# Altium PCB MotorControllerPCB.PcbDoc
Units mm, origin at the board's own origin, x right, y up, seen from the top; angles counter-clockwise.
Board outline 50 x 50 mm, 4 copper layers (L1 [Signal], L2 [GND], L3 [GND], L4 [Signal]), stack 1.57 mm thick; 83 components, 53 nets, 347 pads, 135 vias.
Unrouted connection lines stored in the file: 178.
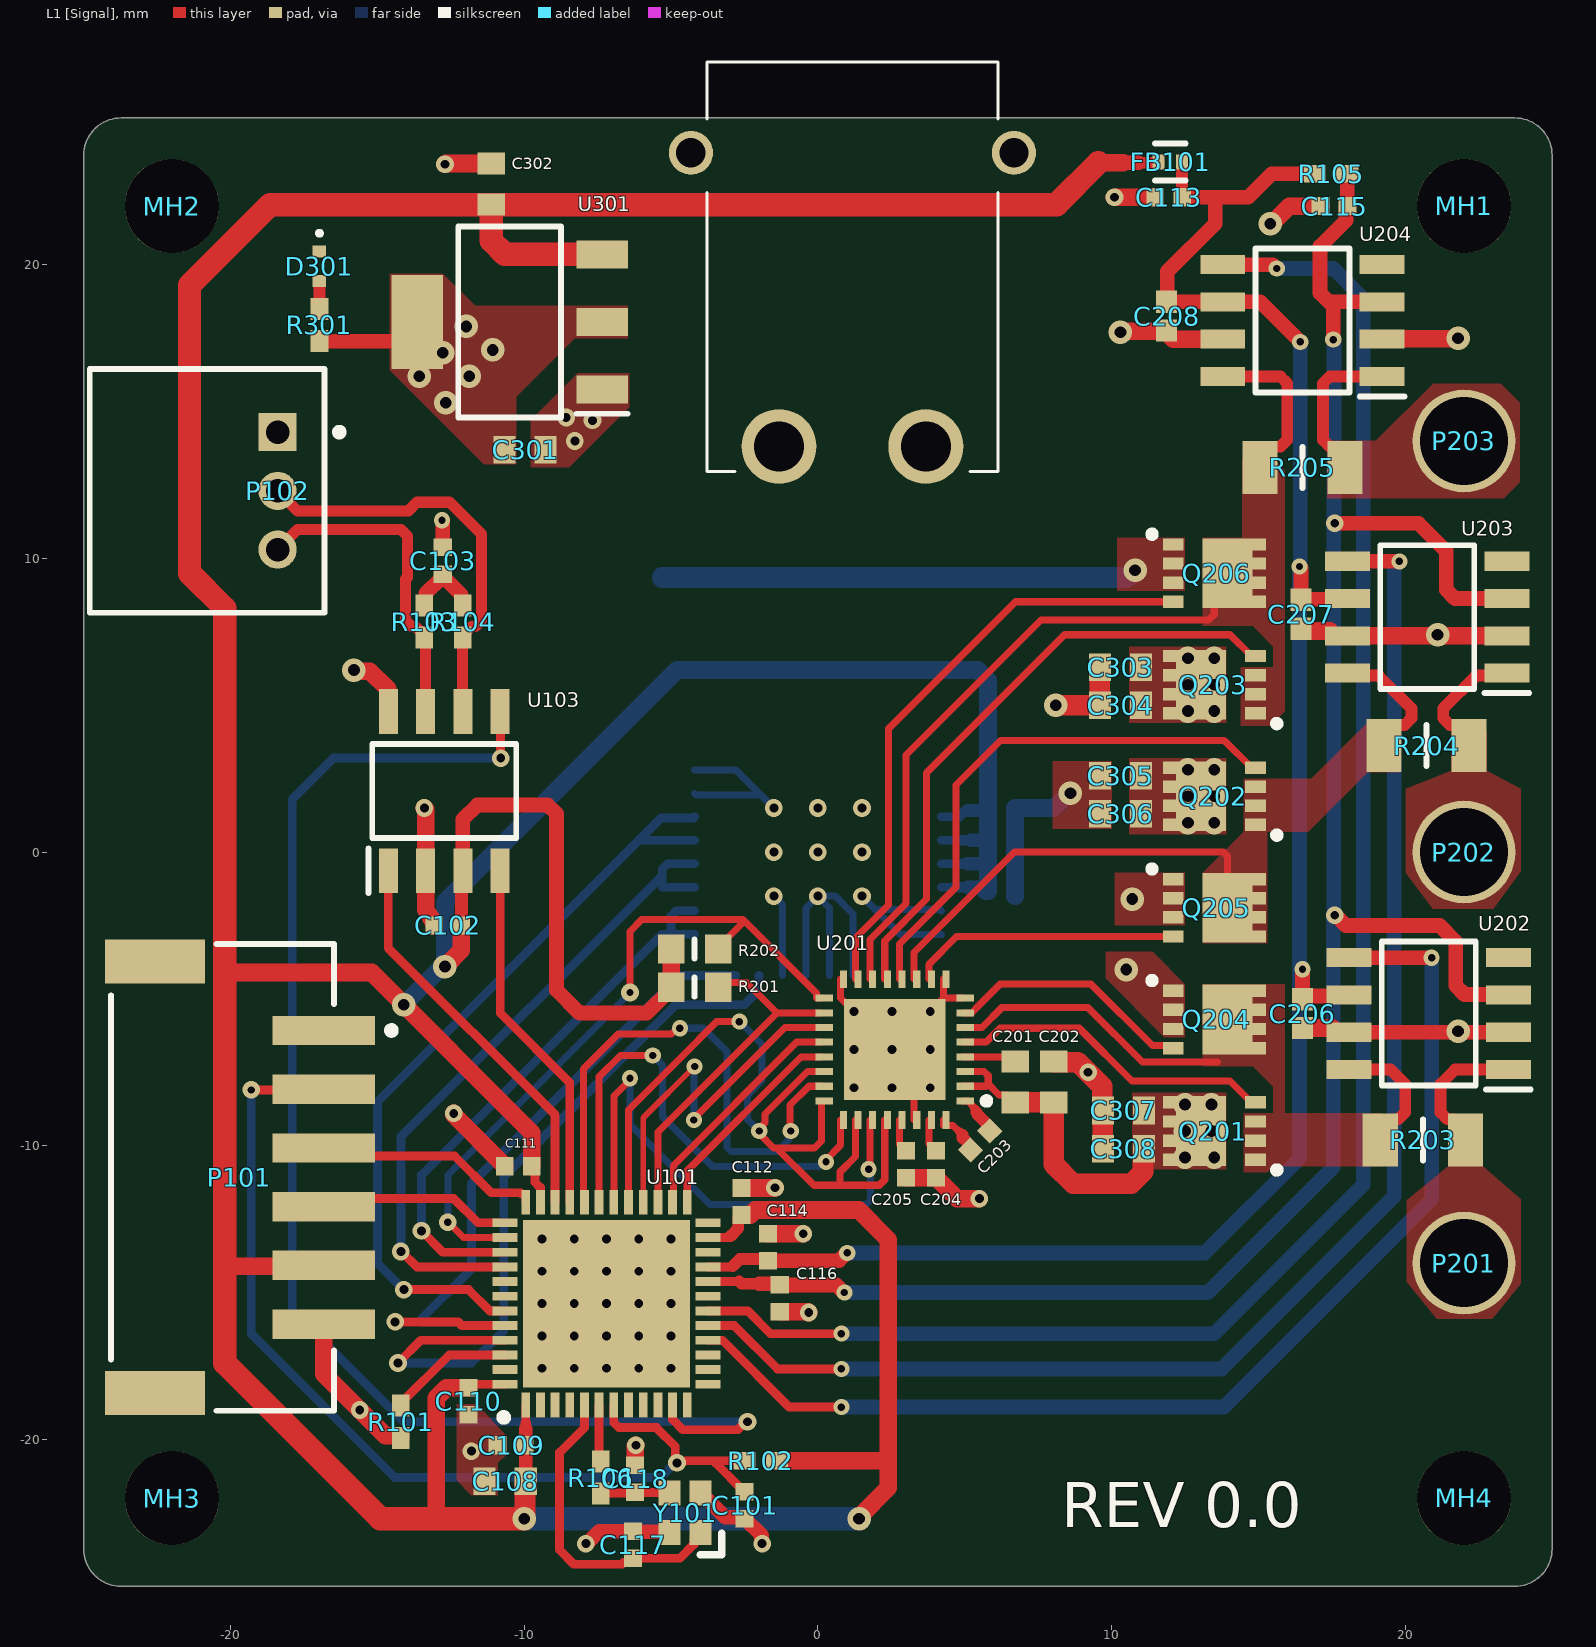
[diagram p0: L1 [Signal] view]
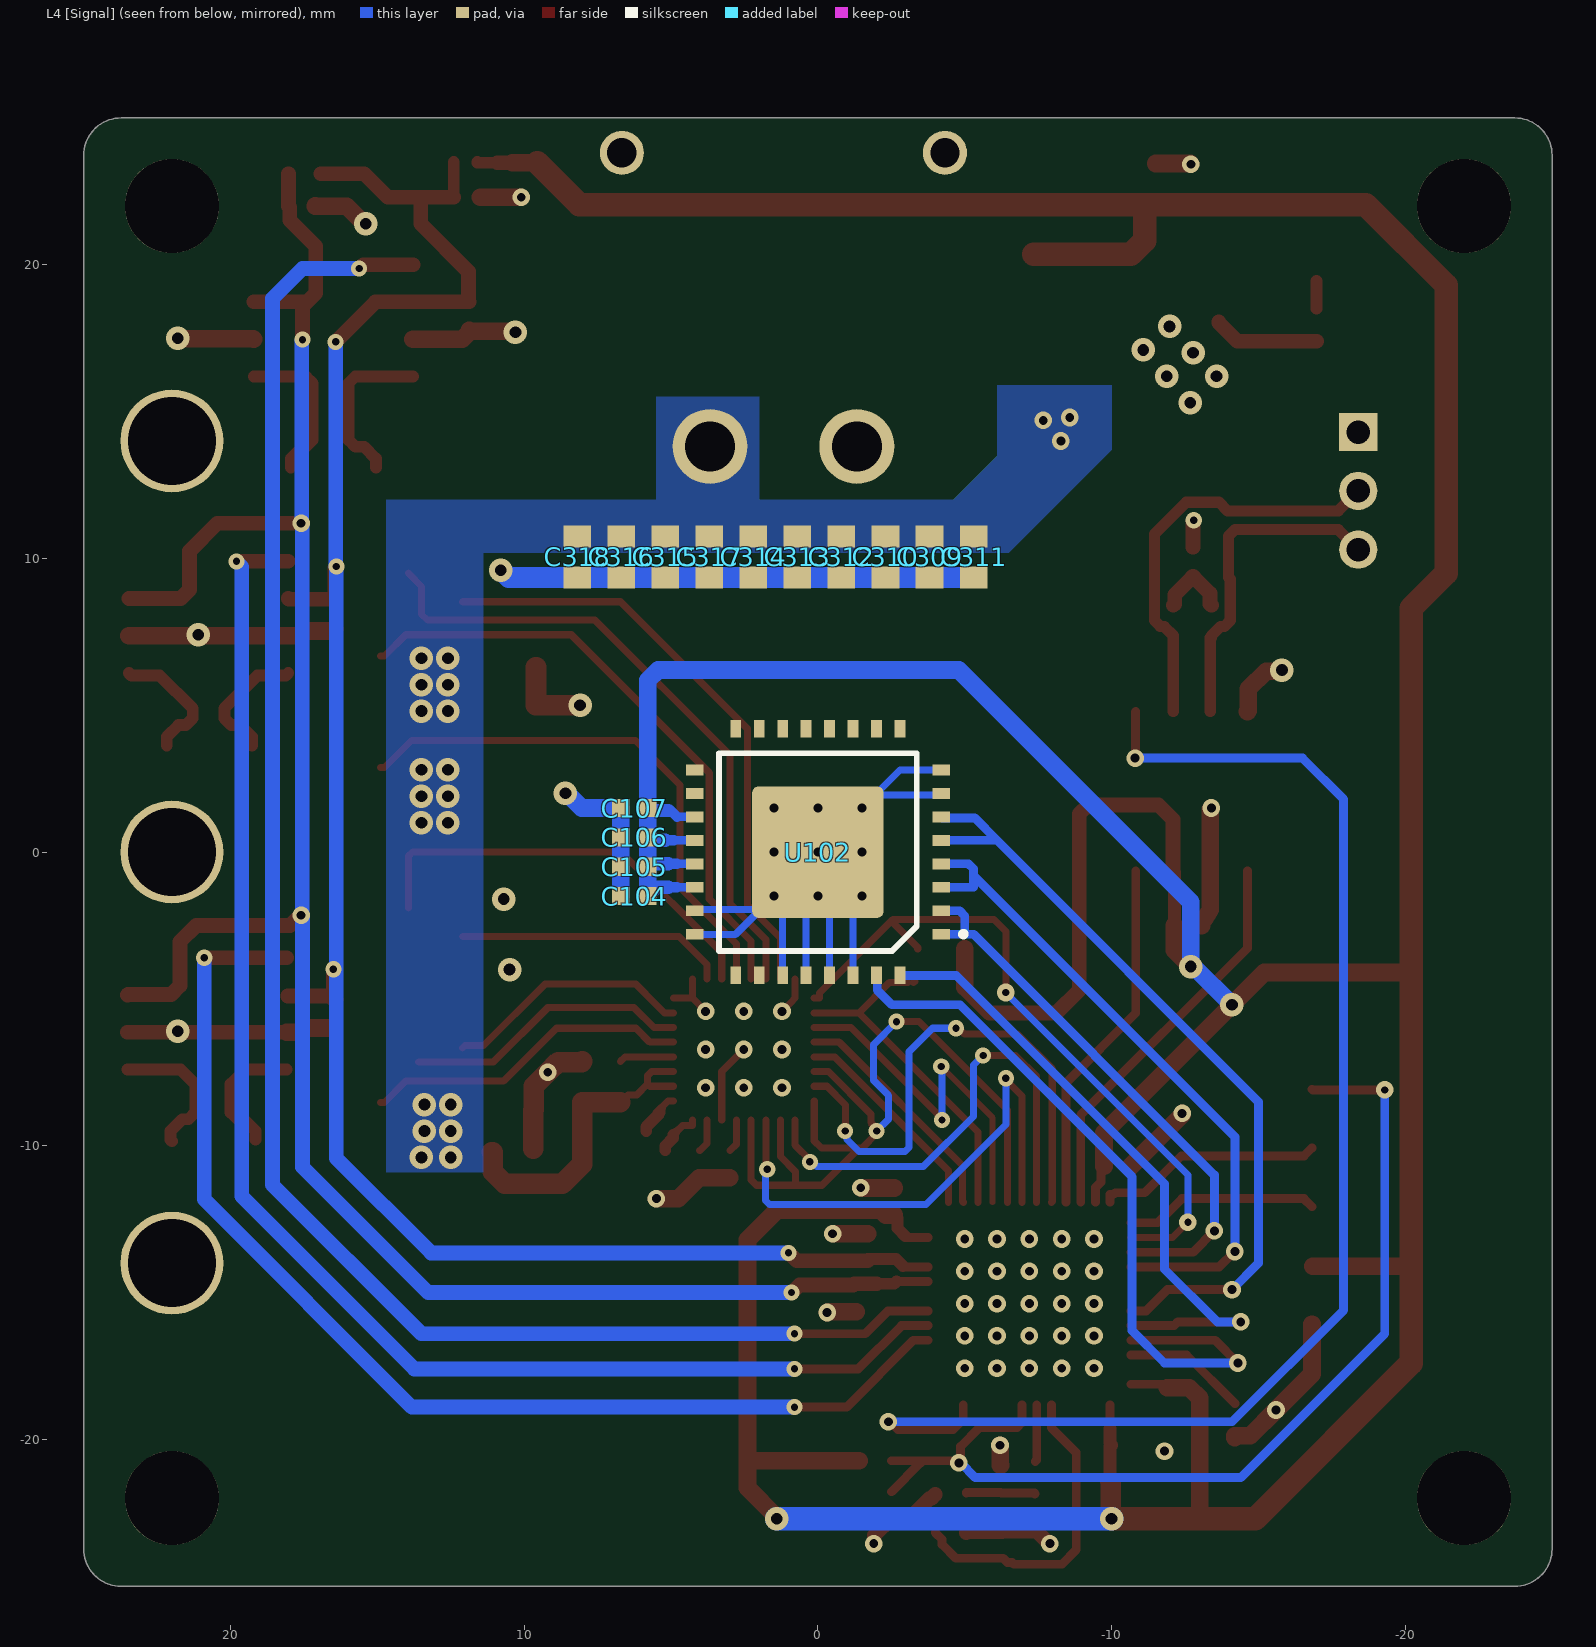
[diagram p1: L4 [Signal] view, seen from below]
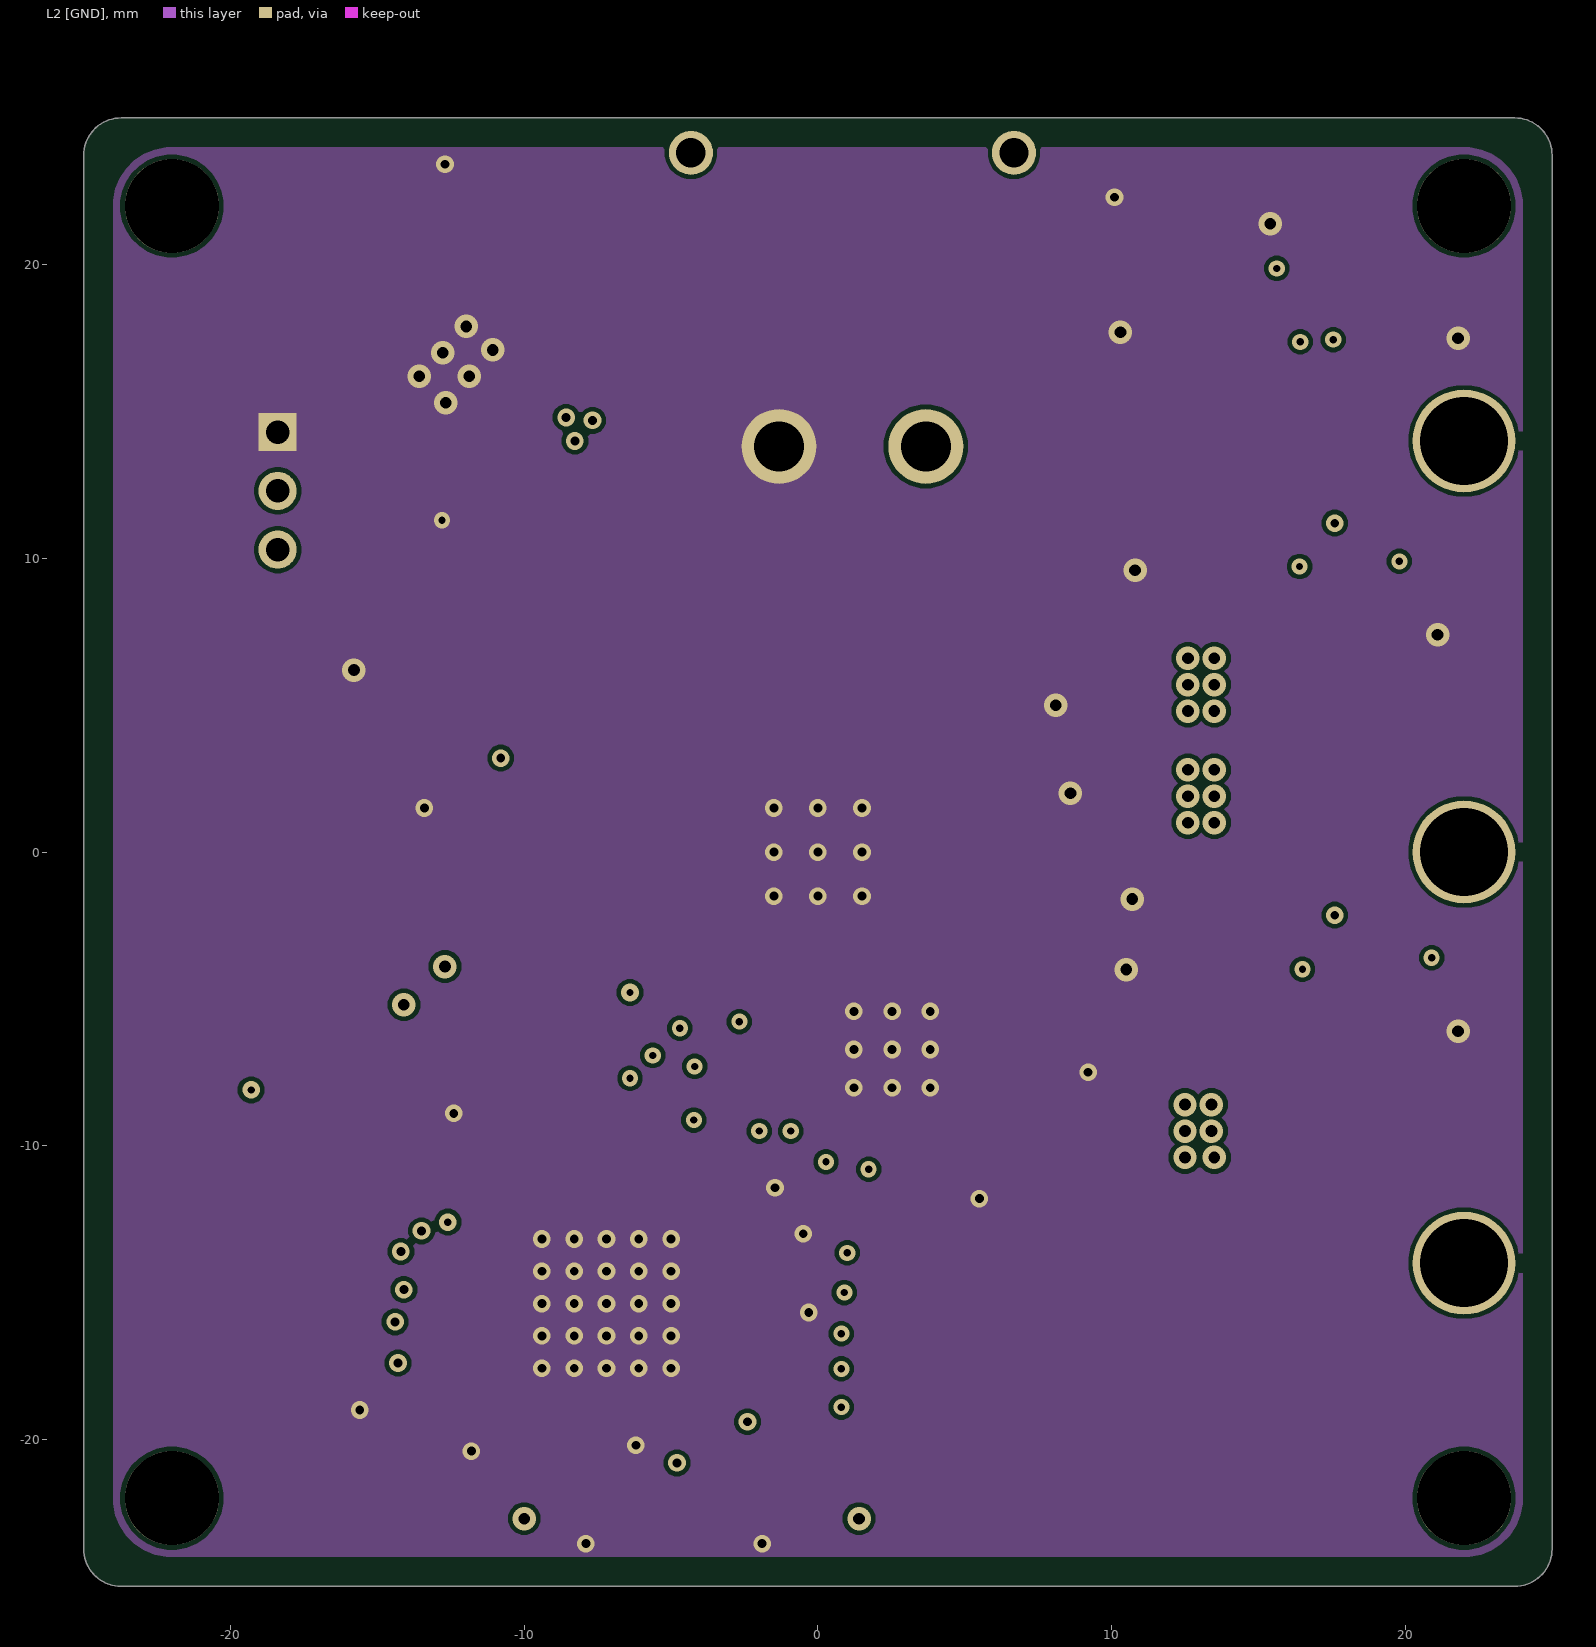
[diagram p2: L2 [GND]]
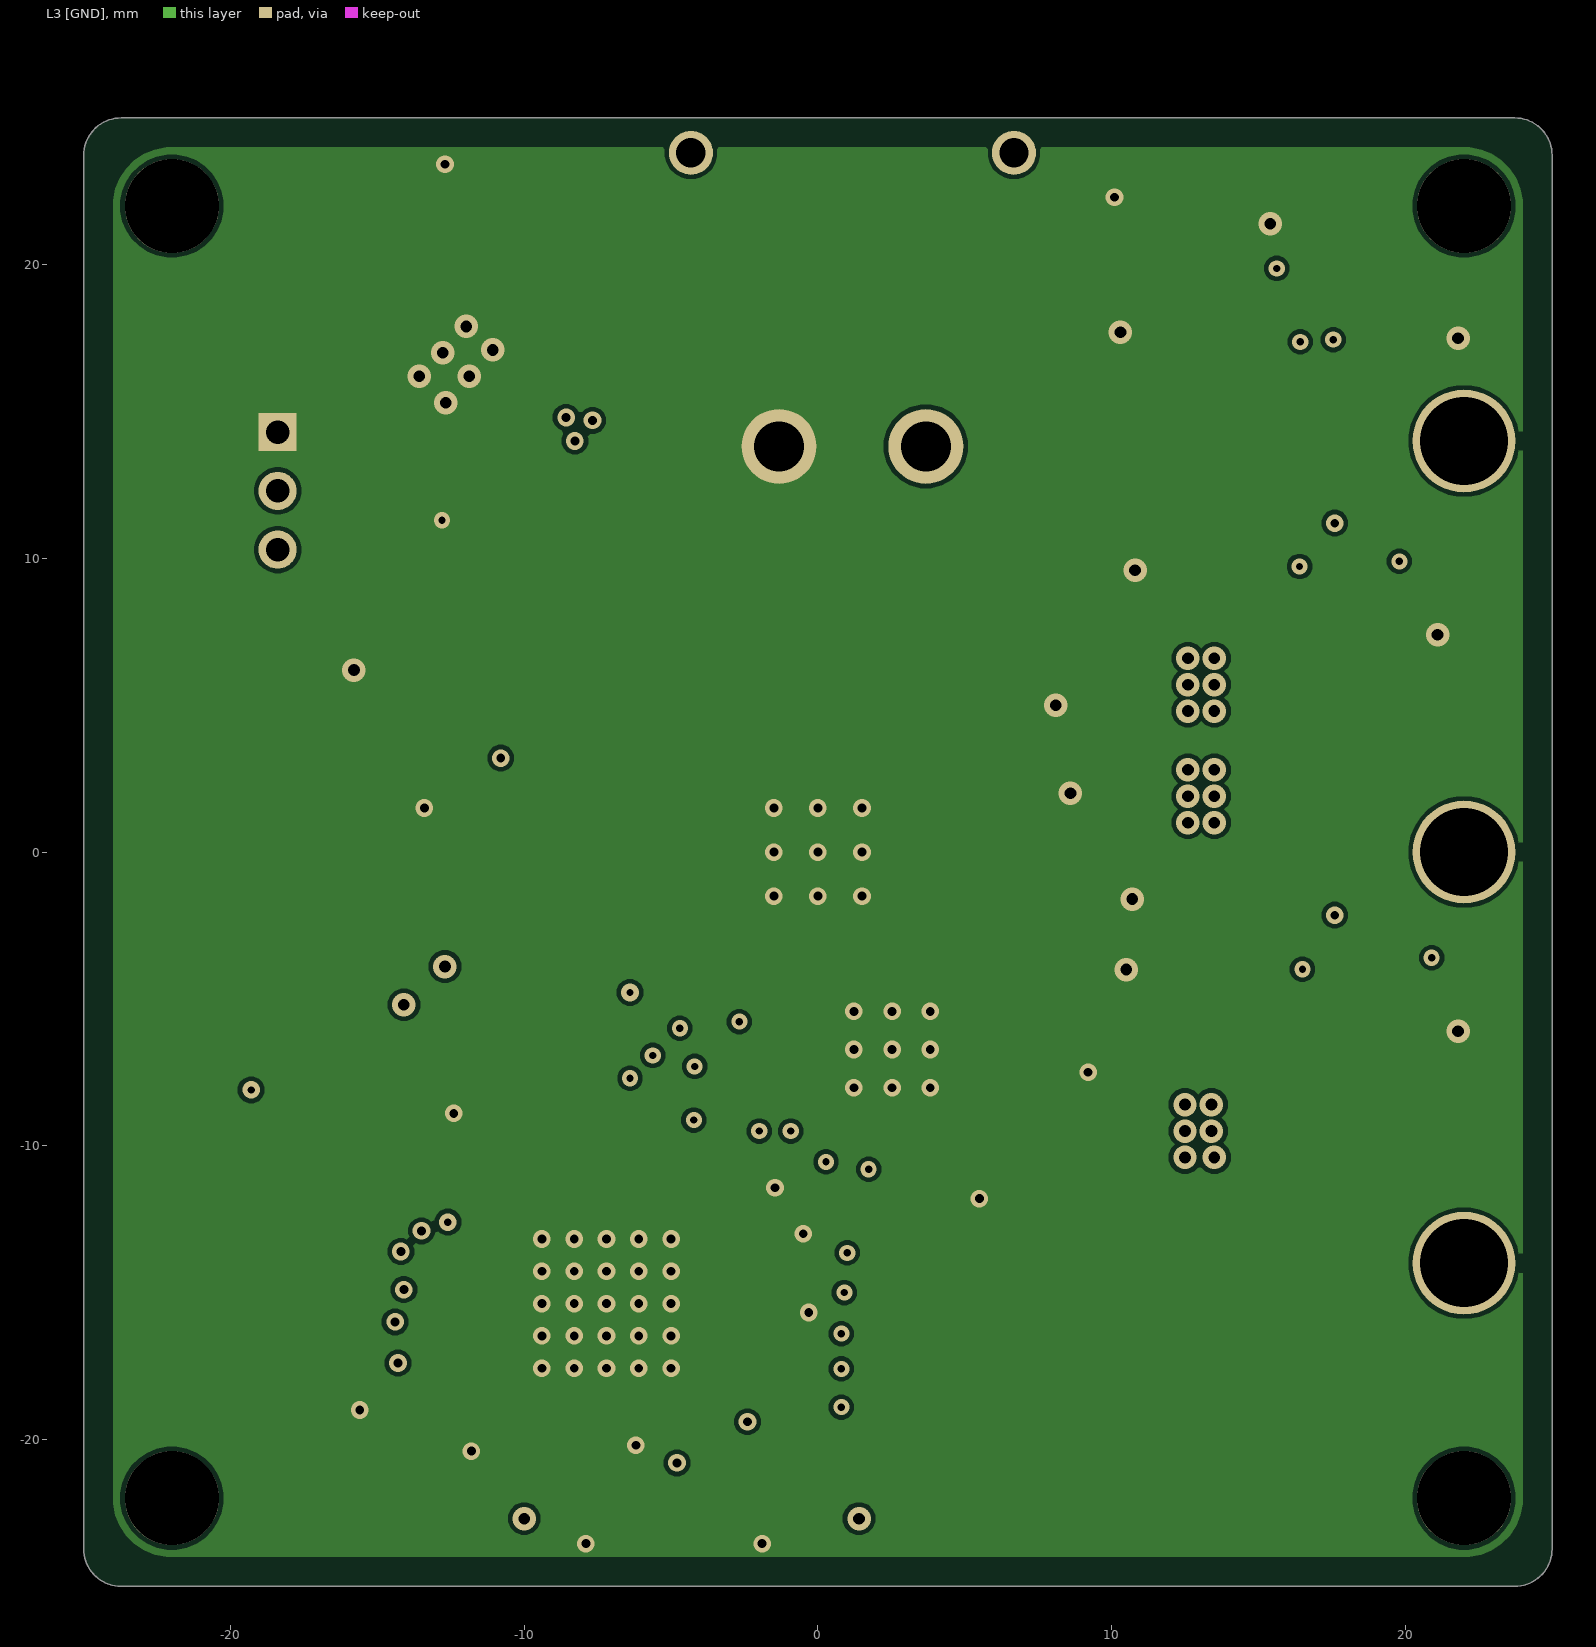
[diagram p3: L3 [GND]]
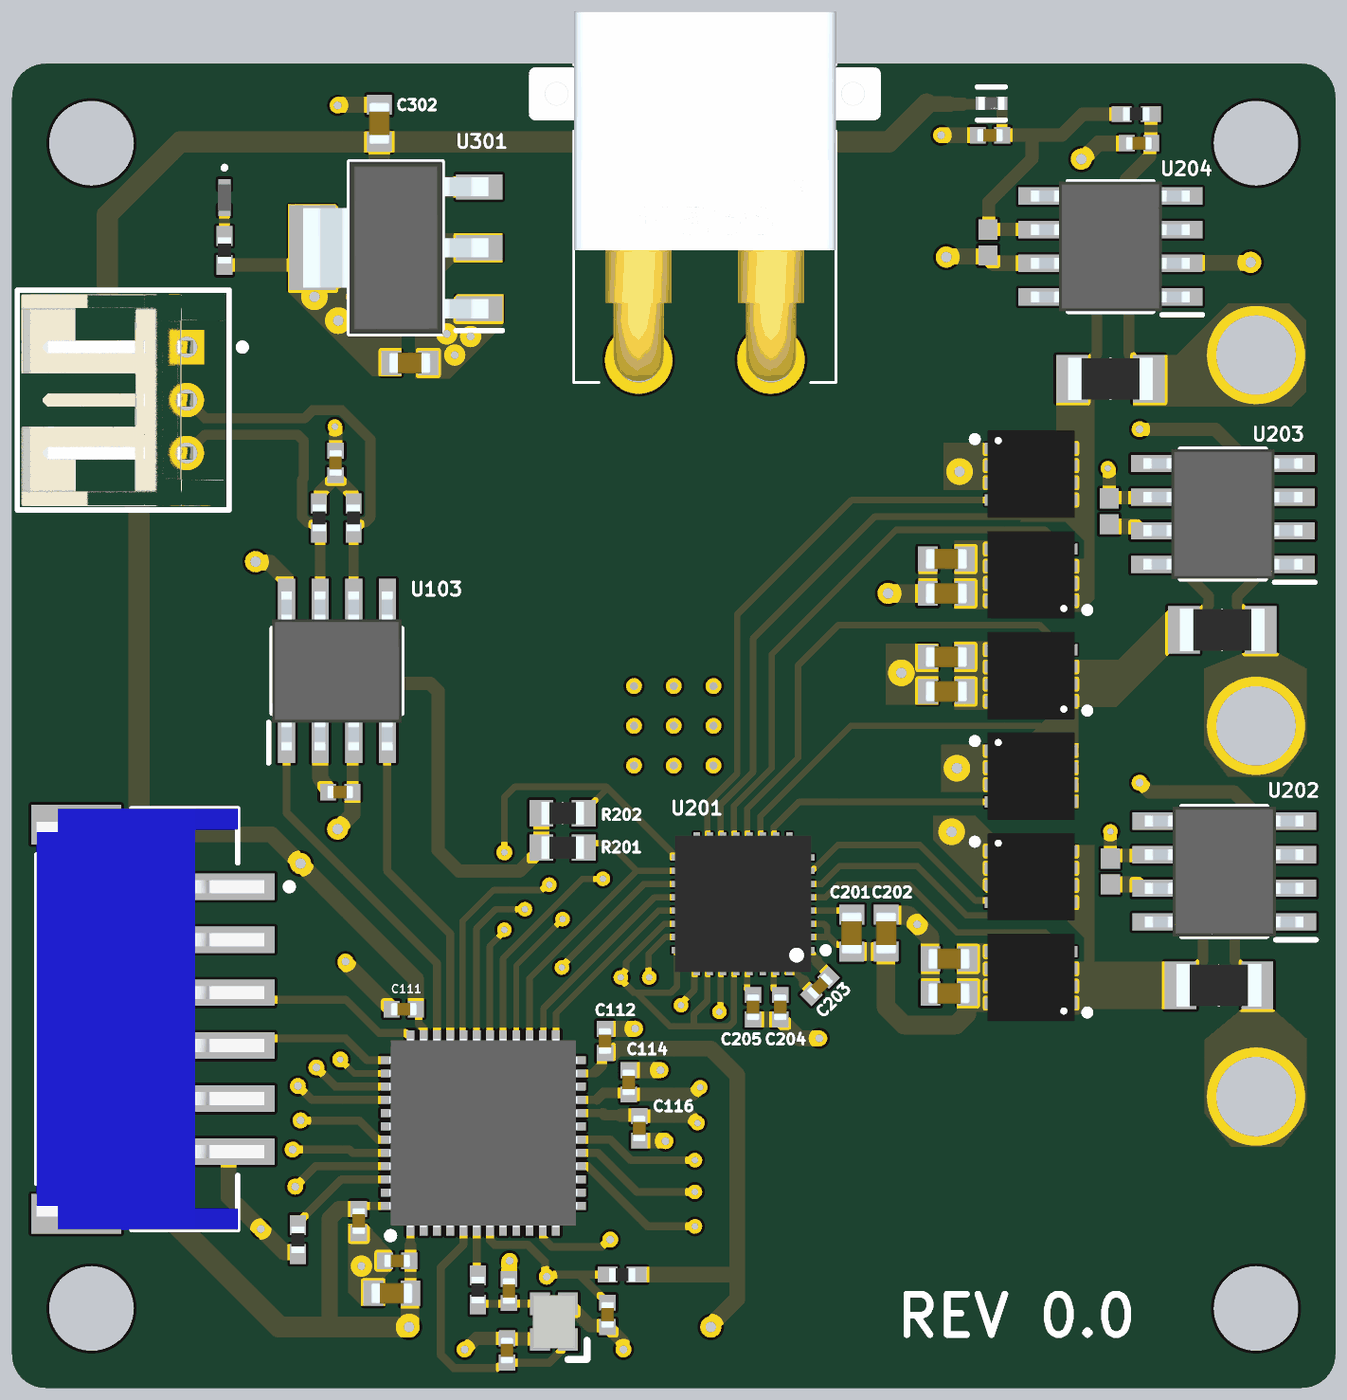
[diagram p4: 3D render of the assembled board from above, using the file's embedded part models]
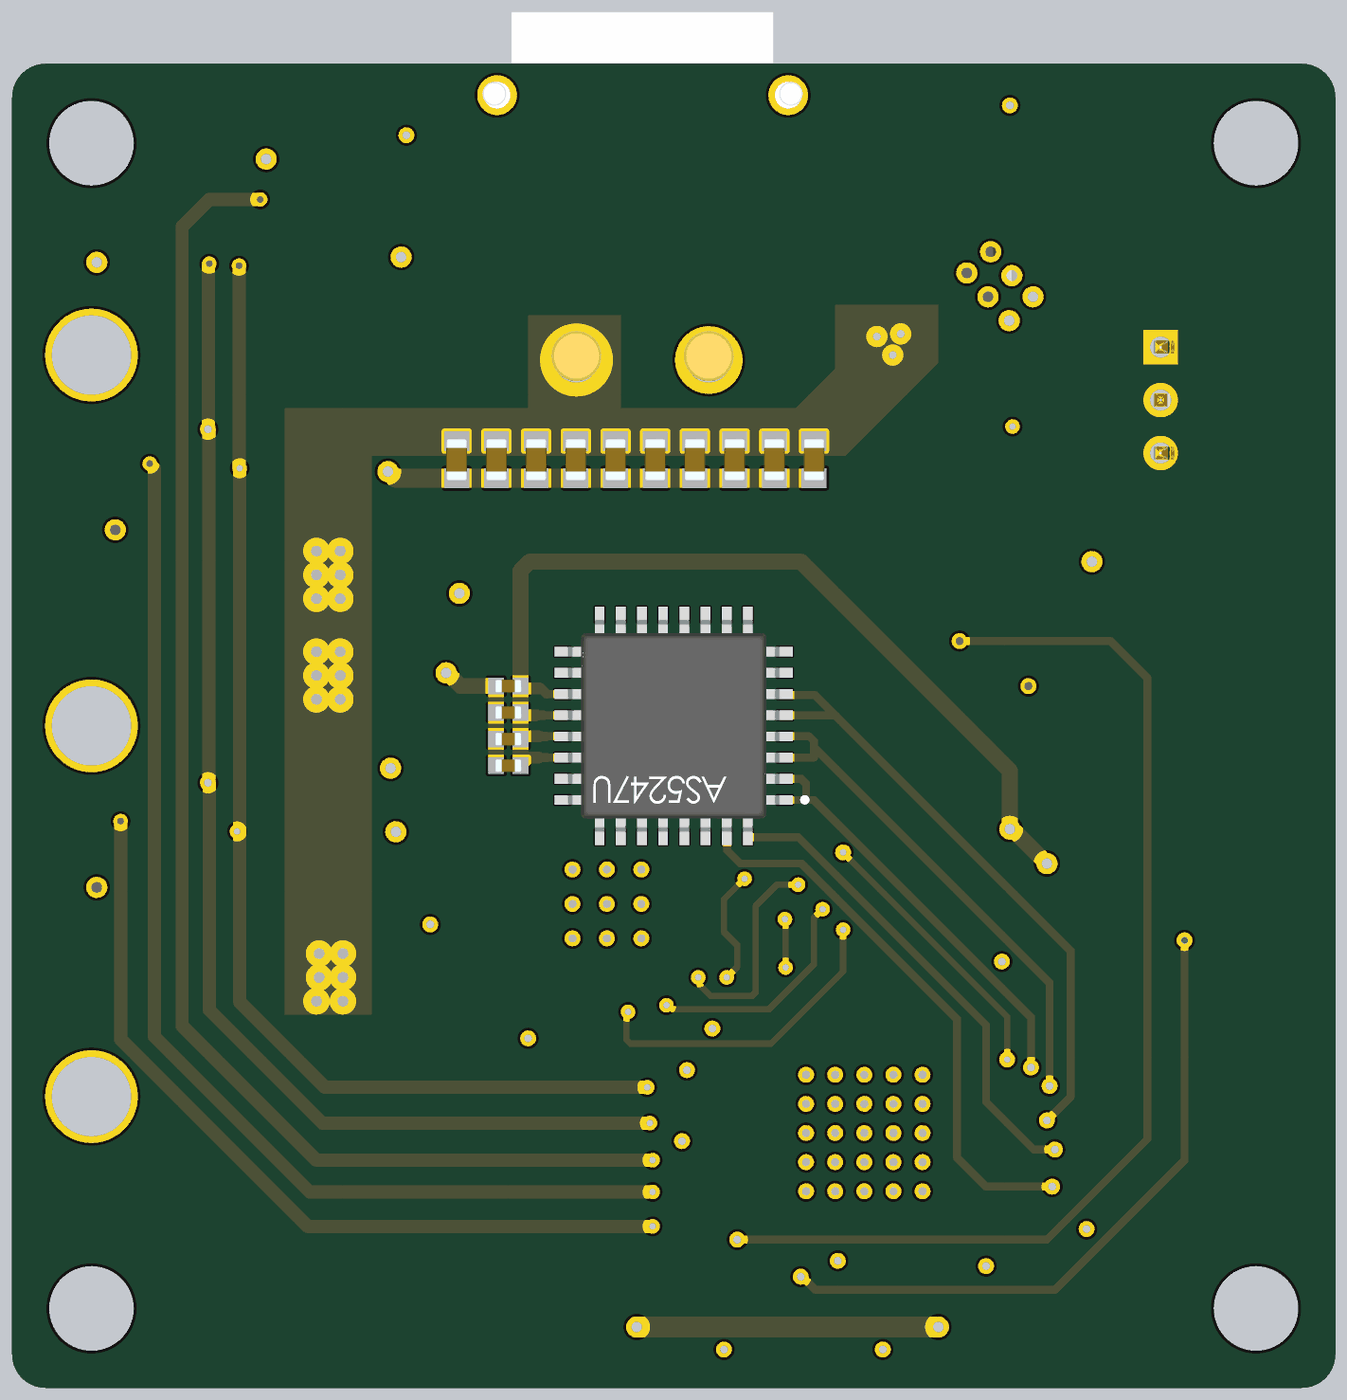
[diagram p5: 3D render of the assembled board from below, using the file's embedded part models]

## Layer stack, top to bottom
Top Solder: solder mask 0.0254, SM-001, Dk 4
L1 [Signal]: signal copper 0.035
Dielectric 1: prepreg 0.2, PP-017, Dk 4.6
L2 [GND]: signal copper 0.0175
Dielectric 3: core 1.065, Core-039, Dk 4.6
L3 [GND]: signal copper 0.0175
Dielectric 5: prepreg 0.2, PP-017, Dk 4.6
L4 [Signal]: signal copper 0.035
Bottom Solder: solder mask 0.0254, SM-001, Dk 4

## Board outline
-25,-23.73 -25,23.73 cw(c-23.73,23.73) -23.73,25 23.73,25 cw(c23.73,23.73) 25,23.73 25,-23.73 cw(c23.73,-23.73) 23.73,-25 -23.73,-25 cw(c-23.73,-23.73)

## Design rules (kind name [scope] priority, off if disabled: settings)
Clearance [All] p1: gap=0.15 ignorepadtopadclearanceinfootprint=FALSE
DiffPairsRouting [All] p1: maxlimit=0.254 minlimit=0.254 mostfreqgap=0.254 toplayer_minwidth=0.381 toplayer_maxwidth=0.381 toplayer_prefwidth=0.381 midlayer1_minwidth=0.381 midlayer1_maxwidth=0.381 midlayer1_prefwidth=0.381 midlayer2_minwidth=0.381 midlayer2_maxwidth=0.381 midlayer2_prefwidth=0.381 bottomlayer_minwidth=0.381 bottomlayer_maxwidth=0.381 bottomlayer_prefwidth=0.381 maxuncoupledlength=12.7
HoleSize [All] p1: absolutevalues=TRUE maxlimit=6.3 minlimit=0.2 maxpercent=80.000 minpercent=20.000
HoleToHoleClearance [All] p1: gap=0.15 allowstackedmicrovias=TRUE
MinimumAnnularRing [All] p1: minimumring=0.15
MinimumSolderMaskSliver [All] p1: minsoldermaskwidth=0.1
PolygonConnect [All] p1: connectstyle=Direct reliefconductorwidth=0.254 reliefentries=4 polygonreliefangle="90 Angle" airgapwidth=0.254
RoutingVias [All] p1: holewidth=0.3 width=0.6 viastyle="Through Hole" minholewidth=0.15 minwidth=0.55 maxholewidth=0.4 maxwidth=0.9
SilkToSilkClearance [All] p1: silktosilkclearance=0.1
SilkToSolderMaskClearance [IsPad] p1: minsilkscreentomaskgap=0.1 clearancetoexposedcopper=TRUE
SolderMaskExpansion [All] p1: expansion=0.102 istentingtop=FALSE
UnRoutedNet [All] p1: checkbadconnections=TRUE
Width [All] p1: maxlimit=1 minlimit=0.15 preferedwidth=0.3 midlayer1_maxwidth=0.254 midlayer1_prefwidth=0.254 midlayer2_maxwidth=0.254 midlayer2_prefwidth=0.254 minimp=50.000000 maximp=50.000000 favimp=50.000000
23 further rules are at their usual default settings.

## Classes and differential pairs
component class Power: C301 C302 C303 C304 C305 C306 C307 C308 C309 C310 C311 C312 C313 C314 C315 C316 C317 C318 D301 MH1 MH2 MH3 MH4 R301 U301
component class "Microcontroller Schematic": C101 C102 C103 C104 C105 C106 C107 C108 C109 C110 C111 C112 C113 C114 C115 C116 C117 C118 FB101 P101 P102 R101 R102 R103 R104 R105 R106 U101 U102 U103 Y101
component class "DRV8350R Schematic": C201 C202 C203 C204 C205 C206 C207 C208 P201 P202 P203 Q201 Q202 Q203 Q205 Q206 R201 R202 R203 R204 R205 U201 U202 U203 U204
differential pair CAN: +CAN_P -CAN_N

## Components (designator, comment, footprint, x,y, rotation, side; value= is the part's Value field where it differs from the comment)
C101 "100n" CAPC1005X55N -2.5,-22.24 r270 top
C102 "100n" CAPC1005X55N -12.6,-2.5 r0 top
C103 "100n" CAPC1005X55N -12.775,9.925 r90 top
C104 "100n" CAPC1005X55N 6.25,-1.5 r180 bottom
C105 "100n" CAPC1005X55N 6.25,-0.5 r180 bottom
C106 "100n" CAPC1005X55N 6.25,0.5 r180 bottom
C107 "100n" CAPC1005X55N 6.25,1.5 r180 bottom
C108 "4u7" CAPC1608X90N -10.65,-21.425 r180 top
C109 "100n" CAPC1005X55N -10.45,-20.2 r0 top
C110 "100n" CAPC1005X55N -11.9,-18.7 r90 top
C111 "100n" CAPC1005X55N -10.2,-10.7 r0 top
C112 "100n" CAPC1005X55N -2.6,-11.9 r270 top
C113 "1u" CAPC1005X55N 11.95,22.3 r0 top
C114 "100n" CAPC1005X55N -1.7,-13.46 r270 top
C115 "1u" CAPC1005X55N 17.575,22 r0 top
C116 "100n" CAPC1005X55N -1.3,-15.2 r90 top
C117 "10p" CAPC1005X55N -6.3,-23.585 r270 top
C118 "10p" CAPC1005X55N -6.225,-21.34 r270 top
C201 "10uF" CAPC1608X90N 6.725,-7.825 r90 top
C202 "100n" CAPC1608X90N 8.025,-7.825 r270 top
C203 "47n" CAPC1005X55N 5.525,-9.825 r45 top
C204 "1u" CAPC1005X55N 4.025,-10.625 r270 top
C205 "1u" CAPC1005X55N 3,-10.625 r90 top
C206 "100n" CAPC1050X55X23ML05T13 16.5,-5.5 r90 top
C207 "100n" CAPC1050X55X23ML05T13 16.45,8.1 r90 top
C208 "100n" CAPC1050X55X23ML05T13 11.875,18.25 r90 top
C301 "2u2" CAPC1608X90N -9.975,13.7 r0 top
C302 "2u2" CAPC1608X90N -11.125,22.75 r270 top
C303 "10u" CAPC1608X90N 10.3,6.3 r0 top
C304 "10u" CAPC1608X90N 10.3,5 r0 top
C305 "10u" CAPC1608X90N 10.3,2.6 r0 top
C306 "10u" CAPC1608X90N 10.3,1.3 r0 top
C307 "10u" CAPC1608X90N 10.4,-8.8 r0 top
C308 "10u" CAPC1608X90N 10.4,-10.1 r0 top
C309 "10u" CAPC1608X90N -3.8,10.05 r90 bottom
C310 "10u" CAPC1608X90N -2.3,10.05 r90 bottom
C311 "10u" CAPC1608X90N -5.3,10.05 r90 bottom
C312 "10u" CAPC1608X90N -0.8,10.05 r90 bottom
C313 "10u" CAPC1608X90N 0.7,10.05 r90 bottom
C314 "10u" CAPC1608X90N 2.2,10.05 r90 bottom
C315 "10u" CAPC1608X90N 5.2,10.05 r90 bottom
C316 "10u" CAPC1608X90N 6.7,10.05 r90 bottom
C317 "10u" CAPC1608X90N 3.7,10.05 r90 bottom
C318 "10u" CAPC1608X90N 8.2,10.05 r90 bottom
D301 "GRN_0402_LED" 150040GS73220 -16.975,19.95 r270 top
FB101 "BLM15AG121SN1D" FP-BLM15-0_05-MFG 12,23.5 r0 top
MH1 "MH" MH#1 22.55,22.575 r0 top
MH2 "MH" MH#2 -22.375,22.45 r0 top
MH3 "MH" MH#3 -22.525,-22.775 r0 top
MH4 "MH" MH#4 22.375,-22.725 r0 top
P101 "S6B-PH-SM4-TB(LF)(SN)" JST-S6B-PH-SM4-TB(LF)(SN)_V -19.7,-11.075 r270 top
P102 "440055-3" FP-440055-3-MFG -20.798,12.3 r90 top
P201 "PHASE_A" PAD_HOLE#1 22.1,-13.725 r0 top
P202 "PHASE_B" PAD_HOLE#2 22.1,0.6 r90 top
P203 "PHASE_C" PAD_HOLE#3 21.925,14.025 r180 top
Q201 "NTTFS3D7N06HLTWG" PQFN-8 13.5,-9.5 r90 top
Q202 "NTTFS3D7N06HLTWG" PQFN-8 13.5,1.9 r90 top
Q203 "NTTFS3D7N06HLTWG" PQFN-8 13.5,5.7 r90 top
Q204 "NTTFS3D7N06HLTWG" PQFN-8 13.5,-5.7 r270 top
Q205 "NTTFS3D7N06HLTWG" PQFN-8 13.5,-1.9 r270 top
Q206 "NTTFS3D7N06HLTWG" PQFN-8 13.5,9.5 r270 top
R101 "120" RESC1005X40N -14.2,-19.4 r270 top
R102 "120" RESC1005X40N -1.95,-20.725 r180 top
R103 "60" RESC1005X40N -13.4,7.85 r270 top
R104 "60" RESC1005X40N -12.1,7.85 r90 top
R105 "47" RESC1005X40N 17.475,23.1 r0 top
R106 "0" RESC1005X40N -7.4,-21.3 r270 top
R201 "2k2" RESC1608X55N -4.2,-4.6 r180 top
R202 "2k2" RESC1608X55N -4.2,-3.3 r180 top
R203 "5m" RESC3216X80N 20.6,-9.8 r0 top
R204 "5m" RESC3216X80N 20.725,3.625 r0 top
R205 "5m" RESC3216X80N 16.5,13.1 r0 top
R301 "1k" RESC1005X40N -16.975,17.95 r270 top
U101 "STM32G473CEU6" QFN50P700X700X65-49N-D -7.2,-15.375 r90 top
U102 "AS5247U" QFN-N32-THM 0,0 r0 bottom
U103 "TCAN337GDR" SOIC127P600X175-8N -12.725,2.075 r90 top
U201 "DRV8350FSRTVR" WQFN-N32-THM 2.615,-6.725 r180 top
U202 "INA240A4EDRQ1" SOIC127P600X175-8N 20.8,-5.5 r180 top
U203 "INA240A4EDRQ1" SOIC127P600X175-8N 20.75,8 r180 top
U204 "INA240A4EDRQ1" SOIC127P600X175-8N 16.5,18.1 r180 top
U301 "MCP1792-3302H_DB" SOT230P700X180-4N -10.5,18.05 r180 top
Y101 "ECX-1637" ECX-1637 -4.525,-22.5 r90 top
? "XT30PW-M" XT30PWM 1.175,19.725 r0 top

## Footprints (in the part's own frame and the unit in brackets; to place one, negate y for a bottom-side part, rotate by r counter-clockwise, add the part's x,y. Pads: shape width x height; smd on the part's side, far side on the other; paste and mask are expansions set on the pad)
150040GS73220 [mm]
  rect 0.4x0.46 smd: 1(-0.5,0) 2(0.5,0)
  silkscreen extent -1.17,-0.05 -1.07,0.05, body extent -0.5,-0.25 0.5,0.25, height 0.45
CAPC1005X55N [mm]
  rect 0.6x0.62 smd: 1(-0.46,0) 2(0.46,0)
  body extent -0.5,-0.25 0.5,0.25, height 0.55
CAPC1050X55X23ML05T13 [mm] "Chip Capacitor, 2-Leads, Body 1.05x0.55mm, IPC Low Density"
  rect 0.76x0.72 smd: 1(-0.49,0) 2(0.49,0)
  body extent -0.53,-0.28 0.53,0.27, height 0.55
CAPC1608X90N [mm]
  rect 0.75x0.94 smd: 1(-0.7,0) 2(0.7,0)
  body extent -0.8,-0.4 0.8,0.4, height 0.9
ECX-1637 [mm]
  rect 0.85x0.75 smd: 1(-0.675,-0.525) 2(0.675,-0.525) 3(0.675,0.525) 4(-0.675,0.525)
  silkscreen extent -1.43,-1.25 -0.7,-0.53, body extent -1,-0.8 1,0.8, height 0.45
FP-440055-3-MFG [mm]
  rect 1.3x1.3 hole 0.8 paste-1000 mask+0: 1(2,-2.4)
  round 1.3 hole 0.8 paste-1000 mask+0: 2(0,-2.4) 3(-2,-2.4)
  silkscreen extent -4.15,-4.63 4.15,4, body extent -4.25,-4.1 4.25,4.1, height 0.25
FP-BLM15-0_05-MFG [mm]
  rect 0.4x0.5 smd paste+0 mask+0: 1(-0.4,0) 2(0.4,0)
  silkscreen extent -0.53,-0.63 0.52,0.63, body extent -0.7,-0.38 0.7,0.38, height 0.25
JST-S6B-PH-SM4-TB(LF)(SN)_V [mm] "SMD, 2-Leads, Body 15.9x7.6mm, Pitch 2mm"
  rect 1x3.5 smd: 1(-5,2.875) 2(-3,2.875) 3(-1,2.875) 4(1,2.875) 5(3,2.875) 6(5,2.875)
  rect 1.5x3.4 smd: MP1(-7.35,-2.875) MP2(7.35,-2.875)
  silkscreen extent -7.95,-4.37 7.95,5.3, body extent -7.95,-4.37 7.95,4.23, height 5.6
MH#1 [mm]
  round 3.2 hole 3.2 unplated: MH(-0.55,-0.575)
MH#2 [mm]
  round 3.2 hole 3.2 unplated: MH(0.375,-0.45)
MH#3 [mm]
  round 3.2 hole 3.2 unplated: MH(0.525,0.775)
MH#4 [mm]
  round 3.2 hole 3.2 unplated: MH(-0.375,0.725)
PAD_HOLE#1 [mm]
  round 3.5 hole 3: 1(-0.1,-0.275)
PAD_HOLE#2 [mm]
  round 3.5 hole 3: 1(-0.6,0.1)
PAD_HOLE#3 [mm]
  round 3.5 hole 3: 1(-0.075,0.025)
PQFN-8 [mm]
  rect 0.42x0.7 smd mask+0.07: 1(-0.975,-1.4) 1(-0.325,-1.4) 1(0.325,-1.4) 2(0.975,-1.4)
  rect 0.42x0.45 smd mask+0.07: 3(-0.975,1.525) 3(-0.325,1.525) 3(0.325,1.525) 3(0.975,1.525)
  rect 2.37x1.7 smd mask+0.07: 3(0,0.45)
  silkscreen extent -1.42,-2.22 -1.23,-2.03, body extent -1.65,-1.65 1.65,1.65, height 0.75
QFN50P700X700X65-49N-D [mm]
  rect 0.85x0.3 smd: 1(-3.45,2.75) 2(-3.45,2.25) 3(-3.45,1.75) 4(-3.45,1.25) 5(-3.45,0.75) 6(-3.45,0.25) 7(-3.45,-0.25) 8(-3.45,-0.75) 9(-3.45,-1.25) 10(-3.45,-1.75) 11(-3.45,-2.25) 12(-3.45,-2.75) 25(3.45,-2.75) 26(3.45,-2.25) 27(3.45,-1.75) 28(3.45,-1.25) 29(3.45,-0.75) 30(3.45,-0.25) 31(3.45,0.25) 32(3.45,0.75) 33(3.45,1.25) 34(3.45,1.75) 35(3.45,2.25) 36(3.45,2.75)
  rect 0.3x0.85 smd: 13(-2.75,-3.45) 14(-2.25,-3.45) 15(-1.75,-3.45) 16(-1.25,-3.45) 17(-0.75,-3.45) 18(-0.25,-3.45) 19(0.25,-3.45) 20(0.75,-3.45) 21(1.25,-3.45) 22(1.75,-3.45) 23(2.25,-3.45) 24(2.75,-3.45) 37(2.75,3.45) 38(2.25,3.45) 39(1.75,3.45) 40(1.25,3.45) 41(0.75,3.45) 42(0.25,3.45) 43(-0.25,3.45) 44(-0.75,3.45) 45(-1.25,3.45) 46(-1.75,3.45) 47(-2.25,3.45) 48(-2.75,3.45)
  rect 5.7x5.7 smd: 49(0,0)
  silkscreen extent -4,3.37 -3.75,3.62, body extent -3.55,-3.55 3.55,3.55, height 0.65
QFN-N32-THM [mm]
  rect 0.6x0.37 smd mask+0.05: 1(-4.2,2.8) 2(-4.2,2) 3(-4.2,1.2) 4(-4.2,0.4) 5(-4.2,-0.4) 6(-4.2,-1.2) 7(-4.2,-2) 8(-4.2,-2.8) 17(4.2,-2.8) 18(4.2,-2) 19(4.2,-1.2) 20(4.2,-0.4) 21(4.2,0.4) 22(4.2,1.2) 23(4.2,2) 24(4.2,2.8)
  rect 0.37x0.6 smd mask+0.05: 9(-2.8,-4.2) 10(-2,-4.2) 11(-1.2,-4.2) 12(-0.4,-4.2) 13(0.4,-4.2) 14(1.2,-4.2) 15(2,-4.2) 16(2.8,-4.2) 25(2.8,4.2) 26(2,4.2) 27(1.2,4.2) 28(0.4,4.2) 29(-0.4,4.2) 30(-1.2,4.2) 31(-2,4.2) 32(-2.8,4.2)
  rrect10% 4.48x4.48 smd mask+0.05: 33(0,0)
  silkscreen extent -5,-3.37 3.37,3.37, body extent -4.51,-4.51 4.51,4.51, height 1.32
RESC1005X40N [mm]
  rect 0.75x0.6 smd: 1(-0.55,0) 2(0.55,0)
  body extent -0.5,-0.25 0.5,0.25, height 0.4
RESC1608X55N [mm]
  rect 0.9x1 smd: 1(-0.8,0) 2(0.8,0)
  silkscreen extent 0,-0.33 0,0.33, body extent -0.8,-0.43 0.8,0.43, height 0.55
RESC3216X80N [mm]
  rect 1.2x1.8 smd: 1(-1.45,0) 2(1.45,0)
  silkscreen extent 0,-0.7 0,0.7, body extent -1.6,-0.8 1.6,0.8, height 0.8
SOIC127P600X175-8N [mm]
  rect 1.525x0.65 smd: 1(-2.712,1.905) 2(-2.712,0.635) 3(-2.712,-0.635) 4(-2.712,-1.905) 5(2.712,-1.905) 6(2.712,-0.635) 7(2.712,0.635) 8(2.712,1.905)
  silkscreen extent -3.47,-2.45 1.6,2.58, body extent -3,-2.45 3,2.45, height 1.75
SOT230P700X180-4N [mm]
  rect 1.75x0.95 smd: 1(-3.15,2.3) 2(-3.15,0) 3(-3.15,-2.3)
  rect 1.75x3.2 smd: 4(3.15,0)
  silkscreen extent -4.03,-3.25 1.75,3.25, body extent -3.5,-3.25 3.5,3.25, height 1.8
WQFN-N32-THM [mm]
  rect 0.6x0.24 smd mask+0.075: 1(-2.4,1.75) 2(-2.4,1.25) 3(-2.4,0.75) 4(-2.4,0.25) 5(-2.4,-0.25) 6(-2.4,-0.75) 7(-2.4,-1.25) 8(-2.4,-1.75) 17(2.4,-1.75) 18(2.4,-1.25) 19(2.4,-0.75) 20(2.4,-0.25) 21(2.4,0.25) 22(2.4,0.75) 23(2.4,1.25) 24(2.4,1.75)
  rect 0.24x0.6 smd mask+0.075: 9(-1.75,-2.4) 10(-1.25,-2.4) 11(-0.75,-2.4) 12(-0.25,-2.4) 13(0.25,-2.4) 14(0.75,-2.4) 15(1.25,-2.4) 16(1.75,-2.4) 25(1.75,2.4) 26(1.25,2.4) 27(0.75,2.4) 28(0.25,2.4) 29(-0.25,2.4) 30(-0.75,2.4) 31(-1.25,2.4) 32(-1.75,2.4)
  rect 3.45x3.45 smd: 33(0,0)
  silkscreen extent -3.23,1.65 -3.02,1.85, body extent -2.58,-2.58 2.58,2.58, height 0.8
XT30PWM [mm]
  round 2.55 hole 1.7: 1(-2.5,-5.912) 2(2.5,-5.912)
  round 1.5 hole 1: 3(5.5,4.088) 4(-5.5,4.088)
  silkscreen extent -4.95,-6.76 4.95,7.19, body extent -6.65,-6.71 6.65,7.24, height 5.06

## Part data
C101 C102 C103 C104 C105 C106 C107 C109 C110 C111 C112 C113 C114 C115 C116 C117 C118: library part CAP_0402_16V, "Capacitor", Arrow Part Number=CL05B104KO5NNNC, Manufacturer_Name="Samsung Electro-Mechanics", Mouser Part Number=187-CL05B104KO5NNNC, Arrow Price/Stock=https://www.arrow.com/en/products/cl05b104ko5nnnc/samsung-electro-mechanics, Datasheet Link=https://datasheet.datasheetarchive.com/originals/distributors/Datasheets-DGA10/2408147.pdf, Height=0.55mm, Manufacturer_Part_Number=CL05B104KO5NNNC, Mouser Price/Stock=https://www.mouser.co.uk/ProductDetail/Samsung-Electro-Mechanics/CL05B104KO5NNNC?qs=hqM3L16%252BxlfT2SKOuAUq6Q%3D%3D
C108: library part CAP_0603_16V, "Capacitor", Arrow Part Number=CL05B104KO5NNNC, Manufacturer_Name="Samsung Electro-Mechanics", Mouser Part Number=187-CL05B104KO5NNNC, Arrow Price/Stock=https://www.arrow.com/en/products/cl05b104ko5nnnc/samsung-electro-mechanics, Datasheet Link=https://datasheet.datasheetarchive.com/originals/distributors/Datasheets-DGA10/2408147.pdf, Height=0.55mm, Manufacturer_Part_Number=CL05B104KO5NNNC, Mouser Price/Stock=https://www.mouser.co.uk/ProductDetail/Samsung-Electro-Mechanics/CL05B104KO5NNNC?qs=hqM3L16%252BxlfT2SKOuAUq6Q%3D%3D
C201 C303 C304 C305 C306 C307 C308 C309 C310 C311 C312 C313 C314 C315 C316 C317 C318: library part CAP_0805_50V, "Capacitor", Arrow Part Number=CL05B104KO5NNNC, Manufacturer_Name="Samsung Electro-Mechanics", Mouser Part Number=187-CL05B104KO5NNNC, Arrow Price/Stock=https://www.arrow.com/en/products/cl05b104ko5nnnc/samsung-electro-mechanics, Datasheet Link=https://datasheet.datasheetarchive.com/originals/distributors/Datasheets-DGA10/2408147.pdf, Height=0.55mm, Manufacturer_Part_Number=CL05B104KO5NNNC, Mouser Price/Stock=https://www.mouser.co.uk/ProductDetail/Samsung-Electro-Mechanics/CL05B104KO5NNNC?qs=hqM3L16%252BxlfT2SKOuAUq6Q%3D%3D
C202: library part CAP_0603_100V, "Capacitor", Arrow Part Number=CL05B104KO5NNNC, Manufacturer_Name="Samsung Electro-Mechanics", Mouser Part Number=187-CL05B104KO5NNNC, Arrow Price/Stock=https://www.arrow.com/en/products/cl05b104ko5nnnc/samsung-electro-mechanics, Datasheet Link=https://datasheet.datasheetarchive.com/originals/distributors/Datasheets-DGA10/2408147.pdf, Height=0.55mm, Manufacturer_Part_Number=CL05B104KO5NNNC, Mouser Price/Stock=https://www.mouser.co.uk/ProductDetail/Samsung-Electro-Mechanics/CL05B104KO5NNNC?qs=hqM3L16%252BxlfT2SKOuAUq6Q%3D%3D
C203 C204 C205: library part CAP_0402_50V, "Capacitor", Arrow Part Number=CL05B104KO5NNNC, Manufacturer_Name="Samsung Electro-Mechanics", Mouser Part Number=187-CL05B104KO5NNNC, Arrow Price/Stock=https://www.arrow.com/en/products/cl05b104ko5nnnc/samsung-electro-mechanics, Datasheet Link=https://datasheet.datasheetarchive.com/originals/distributors/Datasheets-DGA10/2408147.pdf, Height=0.55mm, Manufacturer_Part_Number=CL05B104KO5NNNC, Mouser Price/Stock=https://www.mouser.co.uk/ProductDetail/Samsung-Electro-Mechanics/CL05B104KO5NNNC?qs=hqM3L16%252BxlfT2SKOuAUq6Q%3D%3D
C206 C207 C208: library part CMP-2000-05439-1, "Chip Capacitor, 100 nF, +/- 10%, 16 V, -55 to 125 degC, 0402 (1005 Metric), RoHS, Tape and Reel", Capacitance=100000pF, Case Size/Dimension=0402, Dielectric=X7R, Manufacturer="Samsung Electro-Mechanics", Rated Voltage=16V, Tolerance (%)=±10%, Datasheet URL=https://datasheet.ciiva.com/29198/458718-da-01-en-vs-kondensator-0402-29198423.pdf, Datasheet Version=Nov-10, Manufacturer URL=http://www.samsungsem.com/global/index.jsp
C301 C302: library part CAP_0603_50V, "Capacitor", Arrow Part Number=CL05B104KO5NNNC, Manufacturer_Name="Samsung Electro-Mechanics", Mouser Part Number=187-CL05B104KO5NNNC, Arrow Price/Stock=https://www.arrow.com/en/products/cl05b104ko5nnnc/samsung-electro-mechanics, Datasheet Link=https://datasheet.datasheetarchive.com/originals/distributors/Datasheets-DGA10/2408147.pdf, Height=0.55mm, Manufacturer_Part_Number=CL05B104KO5NNNC, Mouser Price/Stock=https://www.mouser.co.uk/ProductDetail/Samsung-Electro-Mechanics/CL05B104KO5NNNC?qs=hqM3L16%252BxlfT2SKOuAUq6Q%3D%3D
FB101: library part CMP-0686-00170-4, "Chip Ferrite Bead, 0402, 120Ω @ 100MHz, 0.19Ω, 25%, 550mA", Case Code (Imperial)=0402, Case Code (Metric)=1005, Current Rating=550mA, DC Current=500mA, DC Resistance (DCR)=190mR, Frequency=100MHz, Max Operating Temperature=125°C, Min Operating Temperature=-55°C, Package Quantity=1, Tolerance=25%, Case/Package=0402, Core Material=Ferrite, Depth=0.55mm, Height=0.5mm, Impedance=120R, Lead Free="Lead Free", Length=1mm, Material=Steel, Max Current Rating=550mA, Max DC Current=500mA, Military Standard=Not, Number of Circuits=1, Number of Lines=1, Number of Pins=2, Packaging="Tape and Reel", Radiation Hardening=No, REACH SVHC="No SVHC", Shielding=Unshielded, Termination=SMD/SMT, Test Frequency=100MHz, Width=0.5mm
P101: library part CMP-2000-07027-1, "Male Header, Pitch 2 mm, 1 x 6 Position, Height 5.5 mm, -25 to 85 degC", Manufacturer=JST, Package Description="Male Header, Pitch 2 mm, 1 x 6 Position, Height 5.5 mm", Datasheet URL=https://datasheet.ciiva.com/11747/0900766b80df0d9d-11747278.pdf, Datasheet Version=11/2008, Manufacturer URL=http://www.jst.com/home2.html, Mounting Technology=SurfaceMount, No of Positions=6, Package Reference=S6B-PH-SM4-TB(LF)(SN), Pitch=2mm, Style/Orientation=RightAngleHeader/Plug, Termination=Solder, Type=ShroudedHeader
P102: library part CMP-03369-000061-1, "CONN HEADER R/A 3POS 2MM", Current Rating=3A, Manufacturer="TE Connectivity", Temperature="-25°C to +85°C", Temperature Range High=+85°C, Temperature Range Low=-25°C, Voltage Rating=250V, Automotive=No, Category=Conn, ComponentLink2Description=Datasheet, ComponentLink2URL=https://www.te.com/usa-en/product-440055-3.datasheet.pdf, Conn Gender=Male, Conn Orientation="Right Angle", Contact Material=Tin, Device Class L1=Connectors, Device Class L2="Headers and Wire Housings", Device Class L3=unset, Digikey Description="CONN HEADER R/A 3POS 2MM", Footprint Url=https://www.te.com/commerce/DocumentDelivery/DDEController?Action=showdoc&DocId=Customer+Drawing%7F440055%7FB4%7Fpdf%7FEnglish%7FENG_CD_440055_B4.pdf%7F440055-3, Height=5.25mm, Lead Free=Yes, Manufacturer Part Number=440055-3, Mouser Description="Headers & Wire Housings 3 POS HDR R/A 2.0mm", Number Of Contacts=3, Number Of Rows=1, Octopart=https://octopart.com/440055-3-te+connectivity-40644627, Package=440055-3, Pitch=2mm, RoHS=TRUE
P201 P202 P203: library part 3MM_PAD
R101 R102 R103 R104 R105 R106 R301: library part RES_0402
R201 R202: library part RES_0603
R203 R204 R205: library part RES_1206
U101: "Integrated Circuit", Manufacturer_Name=STMicroelectronics, Mouser Part Number=511-STM32G473CEU6, Arrow Part Number=STM32G473CEU6, Arrow Price/Stock=https://www.arrow.com/en/products/stm32g473ceu6/stmicroelectronics, Datasheet Link=https://www.st.com/resource/en/datasheet/stm32g473cb.pdf, Height=0.65mm, Manufacturer_Part_Number=STM32G473CEU6, Mouser Price/Stock=https://www.mouser.co.uk/ProductDetail/STMicroelectronics/STM32G473CEU6?qs=uwxL4vQweFNR9dwvFWWm2Q%3D%3D
U102: "ams AS5247U Magnetic Rotary Position Sensor", ComponentLink1Description="New link", ComponentLink2Description="New link 1"
U103: "Integrated Circuit", Manufacturer_Name="Texas Instruments", Mouser Part Number=595-TCAN337GDR, Arrow Part Number=TCAN337GDR, Arrow Price/Stock=https://www.arrow.com/en/products/tcan337gdr/texas-instruments?region=nac, Datasheet Link=http://www.ti.com/lit/gpn/tcan337g, Height=1.75mm, Manufacturer_Part_Number=TCAN337GDR, Mouser Price/Stock=https://www.mouser.co.uk/ProductDetail/Texas-Instruments/TCAN337GDR?qs=gMfM3zrbS4qJ%252BEWbPaeUtA%3D%3D
U202 U203 U204: "Integrated Circuit", Manufacturer_Name="Texas Instruments", Mouser Part Number=595-INA240A4EDRQ1, Arrow Part Number=INA240A4EDRQ1, Arrow Price/Stock=https://www.arrow.com/en/products/ina240a4edrq1/texas-instruments, Datasheet Link=http://www.ti.com/lit/ds/symlink/ina240-q1.pdf, Height=1.75mm, Manufacturer_Part_Number=INA240A4EDRQ1, Mouser Price/Stock=https://www.mouser.co.uk/ProductDetail/Texas-Instruments/INA240A4EDRQ1?qs=yBt6ao%2FxsTymmpZKpOwKvQ%3D%3D
U301: "Integrated Circuit", Arrow Part Number=MCP1792-3302H/DB, Manufacturer_Name=Microchip, Mouser Part Number=579-MCP1792-3302HDB, Arrow Price/Stock=https://www.arrow.com/en/products/mcp1792-3302hdb/microchip-technology, Datasheet Link=http://ww1.microchip.com/downloads/en/DeviceDoc/MCP1792-Family-Data-Sheet-DS20006229C.pdf, Height=1.8mm, Manufacturer_Part_Number=MCP1792-3302H/DB, Mouser Price/Stock=https://www.mouser.co.uk/ProductDetail/Microchip-Technology/MCP1792-3302H-DB?qs=mAH9sUMRCttoG5iLrM6fSg%3D%3D
?: "Connector", Manufacturer_Name=Amass, Datasheet Link=https://www.tme.eu/sl/Document/ce4077e36b79046da520ca73227e15de/XT30PW%20SPEC.pdf, Height=5mm, Manufacturer_Part_Number=XT30PW-M

## Via types
v1: diameter 0.6, hole 0.3, L1 [Signal] to L4 [Signal], 70 vias
v2: diameter 0.8, hole 0.4, L1 [Signal] to L4 [Signal], 39 vias
v3: diameter 0.55, hole 0.25, L1 [Signal] to L4 [Signal], 23 vias
v4: diameter 0.6, hole 0.25, L1 [Signal] to L4 [Signal], 3 vias

## Nets (pads, with @x,y where several pads share a name; then routed paths per layer and width w, separated by ;. In a path a pad name is that pad's centre, name@x,y a point inside that pad or via, vN(x,y) a via of type N, cw(c..) or ccw(c..) an arc to the next point about the centre after c; other vN are vias at no path point)
+3V3: C102.2 C104.2 C105.2 C106.2 C107.2 C108.1 C109.2 C110.2 C111.2 C112.2 C302.2 D301.1 FB101.1 P101.5 R102.1 R201.2 R202.2 U101.1 U101.23 U101.35 U101.48 U102.19 U102.20 U102.21 U102.22 U103.3 U301.3 | length 211.2
  L1 [Signal] w0.3: C110.2 -11.785,-18.125 U101.48 ; -9.95,-19.45 U101.1 ; C111.2@-9.635,-10.815 -9.635,-11.241 -9.45,-11.426 U101.35 ; U101.23 -3.025,-13.125 -3,-13.1
  L1 [Signal] w0.35: -9.95,-19.625 -9.95,-19.45
  L1 [Signal] w0.4: -2.975,-13.075 -2.71,-12.81 -2.71,-12.46 -2.61,-12.36 C112.2 ; 10.925,23.475 11.6,23.475 FB101.1
  L1 [Signal] w0.45: C102.2 -12.14,-0.687 U103.3 ; C109.2 -9.95,-20.24 C108.1 ; C109.2@-9.95,-20.125 -9.95,-19.625
  L1 [Signal] w0.5: U103.3 -12.09,1.11 -11.6,1.6 -9.2,1.6 -8.9,1.3 -8.9,-4.7 -8.12,-5.48 -5.83,-5.48 -5,-4.65 R201.2 ; 10.4,23.475 10.925,23.475
  L1 [Signal] w0.6: -20.2,-14.1 P101.5@-16.85,-14.1 ; -20.2,-4.1 -15.2,-4.1 -9.74,-9.56 C111.2 ; -13,-22.7 -13,-18.591 -12.649,-18.24 C110.2 ; v2(-12.7,-3.9) -12.14,-3.34 C102.2 ; R201.2 R202.2 ; C112.2@-2.59,-12.36 -2.306,-12.36 -2.136,-12.19 1.39,-12.19 2.4,-13.2 2.4,-20.7 ; R102.1 2.375,-20.725 2.4,-20.7 ; v2(1.4,-22.7) 1.4,-22.646 2.4,-21.646 2.4,-20.7 ; 9.55,23.475 10.4,23.475
  L1 [Signal] w0.7: v2(-10,-22.7) -10,-22.673 -9.975,-22.648 -9.975,-21.45 C108.1
  L1 [Signal] w0.8: v2(-10,-22.7) -13,-22.7 -14.9,-22.7 -20.2,-17.4 -20.2,-14.1 -20.2,-4.1 -20.2,8.3 -21.4,9.5 -21.4,19.3 -18.65,22.05 C302.2 ; U301.3 -10.656,20.35 -11.125,20.819 C302.2 ; 9.55,23.475 8.125,22.05 C302.2
  L4 [Signal] w0.3: U102.22 4.8,-1.2 ; U102.21 4.8,-0.4 ; U102.20 4.9,0.4 ; U102.19 4.8,1.2
  L4 [Signal] w0.35: 4.8,-1.2 5.1,-1.2 ; 4.8,-0.4 5.1,-0.4 ; 4.8,1.2 5.015,1.415 5.092,1.415 ; 4.9,0.4 5.2,0.4
  L4 [Signal] w0.45: 5.092,1.415 C107.2@5.715,1.415 ; 5.1,-1.2 5.49,-1.2 5.705,-1.415 C104.2@5.79,-1.33 ; 5.1,-0.4 5.69,-0.4 5.705,-0.415 5.715,-0.415 5.79,-0.49 C105.2 ; 5.2,0.4 5.69,0.4 5.705,0.415 5.715,0.415 5.79,0.49 C106.2
  L4 [Signal] w0.6: v2(-14.1,-5.2) -12.8,-3.9 v2(-12.7,-3.9) -12.7,-1.7 -4.8,6.2 5.439,6.2 5.79,5.849 C106.2 C105.2 C104.2@5.79,-1.33
  L4 [Signal] w0.8: v2(-10,-22.7) v2(1.4,-22.7)
A_IN+: Q201.1 Q204.3 R203.1 U201.6 U202.8 | length 14.2
  L1 [Signal] w0.24: U201.6@4.925,-5.975 5.585,-5.975 6.26,-5.3 9.2,-5.3 11.055,-7.155 13.6,-7.155
  L1 [Signal] w0.4: U202.8 19.505,-7.405 20,-7.9 20,-8.866 19.766,-9.1 19.55,-9.1 19.15,-9.5 R203.1
A_IN-: P201.1 R203.2 U202.1 | length 5
  L1 [Signal] w0.4: R203.2@22,-9.85 R203.2 22.05,-9.5 21.65,-9.1 21.434,-9.1 21.2,-8.866 21.2,-7.9 21.695,-7.405 U202.1
AS5247_B_MISO: U101.40 U102.3 U102.4 | length 23.2
  L1 [Signal] w0.3: v1(-14.2,-13.6) -14.189,-13.6 -13.664,-14.125 U101.40
  L4 [Signal] w0.3: v1(-14.2,-13.6) -14.2,-9.7 -5.3,-0.8 ; U102.3 -5.3,-1.2 -5.3,-0.8 ; U102.4 -5.124,-0.4 -5.3,-0.576 -5.3,-0.8
AS5247_B_NCS: U101.45 U102.31 | length 25.1
  L1 [Signal] w0.3: v1(-14.3,-17.4) -13.525,-16.625 U101.45
  L4 [Signal] w0.3: v1(-14.3,-17.4) -11.8,-17.4 -10.7,-16.3 -10.7,-11.062 -4.838,-5.2 -2.513,-5.2 -2.017,-4.704 -2.017,-4.217 U102.31
AS5247_MOSI: U101.43 U102.5 U102.6 | length 27.2
  L1 [Signal] w0.3: v1(-14.1,-14.9) -11.9,-14.9 -11.175,-15.625 U101.43
  L4 [Signal] w0.3: v1(-14.1,-14.9) -15,-14 -15,-8.5 -6.1,0.4 ; U102.5 -6.1,0.4 ; U102.6 -4.235,1.165 -5.335,1.165 -6.1,0.4
AS5247_SCK: U101.39 U102.1 U102.2 | length 19.2
  L1 [Signal] w0.3: v1(-13.5,-12.9) -12.775,-13.625 U101.39
  L4 [Signal] w0.3: v1(-13.5,-12.9) -13.5,-11 -5.3,-2.8 -5,-2.8 ; U102.1 -5,-2.8 ; U102.2 -4.824,-2 -5,-2.176 -5,-2.8
AS5247_T_NCS: U101.44 U102.32 | length 22
  L1 [Signal] w0.3: v1(-14.4,-16) -12.25,-16 -12.125,-16.125 U101.44
  L4 [Signal] w0.3: v1(-14.4,-16) -13.6,-16 -11.8,-14.2 -11.8,-11.3 -4.7,-4.2 U102.32
B_IN+: Q202.1 Q205.3 R204.1 U201.11 U203.8 | length 19.3
  L1 [Signal] w0.24: U201.11@3.275,-4.325 3.275,-3.425 6.7,0 13.809,0 13.95,-0.141 Q205.3@13.95,-1.9
  L1 [Signal] w0.4: U203.8 18.123,6.01 19.09,6.01 20.209,4.891 20.209,4.559 19.975,4.325 19.675,4.325 19.275,3.925 R204.1
B_IN-: P202.1 R204.2 U203.1 | length 4.4
  L1 [Signal] w0.4: R204.2 22.175,3.925 21.775,4.325 21.525,4.325 21.291,4.559 21.291,4.891 22.41,6.01 23.377,6.01 U203.1
BOOT0: R101.1 U101.46 | length 4.2
  L1 [Signal] w0.3: R101.1@-14.2,-18.775 -12.55,-17.125 U101.46
C_IN+: Q203.1 Q206.3 R205.1 U201.14 U204.8 | length 27.9
  L1 [Signal] w0.24: U201.14@1.775,-4.325 1.775,-2.973 3,-1.748 3,3.3 7.6,7.9 13.3,7.9 13.496,8.096 13.496,9.046 Q206.3@13.95,9.5
  L1 [Signal] w0.4: U204.8 15.751,16.195 15.986,15.961 15.986,14.036 15.75,13.8 15.45,13.8 15.05,13.4 R205.1
C_IN-: P203.1 R205.2 U204.1 | length 5.3
  L1 [Signal] w0.4: R205.2 17.95,13.4 17.55,13.8 17.434,13.8 17.2,14.034 17.2,15.961 17.434,16.195 U204.1
C_SPLIT: C103.1 R103.1 R104.2 | length 2.5
  L1 [Signal] w0.5: R103.1 -13.35,8.45 -13.35,8.815 -12.835,9.33 -12.835,9.34 -12.785,9.39 -12.765,9.39 -12.715,9.34 -12.715,9.33 -12.15,8.765 -12.15,8.45 R104.2
CAN_FAULT: U101.11 U103.5 | length 47
  L1 [Signal] w0.3: U103.5 -10.81,4.777 -10.81,3.21 v1(-10.8,3.2) ; U101.11 -4.95,-19.324 -4.6,-19.674 -2.726,-19.674 -2.451,-19.4 v1@-2.413,-19.4
  L4 [Signal] w0.3: v1(-10.8,3.2) -16.5,3.2 -17.9,1.8 -17.9,-15.6 -14.1,-19.4 v1(-2.4,-19.4)
CAN_N: P102.2 R104.1 U103.6 | length 14.2
  L1 [Signal] w0.381: P102.2 -17.716,11.618 -13.952,11.618 -13.654,11.916 -12.545,11.916 -11.459,10.83 -11.459,7.884 -11.659,7.684 -11.791,7.684 -12.1,7.375 R104.1 -12.1,4.787 U103.6
CAN_P: P102.3 R103.2 U103.7 | length 11.2
  L1 [Signal] w0.381: P102.3 -17.716,10.983 -14.202,10.983 -13.979,10.759 -13.979,9.353 -14.04,9.291 -14.04,7.884 -13.841,7.684 -13.709,7.684 -13.4,7.375 R103.2 -13.36,7.3 U103.7
CPH: C203.2 U201.1 | length 1.5
  L1 [Signal] w0.24: U201.1@4.925,-8.475 5.105,-8.475 5.325,-8.695 5.325,-8.725
  L1 [Signal] w0.3: 5.325,-8.725 5.407,-8.807 5.407,-8.843 5.393,-8.857
  L1 [Signal] w0.4: 5.393,-8.857 5.425,-8.89 5.425,-8.933 5.85,-9.358 C203.2
CPL: C203.1 U201.32 | length 1.6
  L1 [Signal] w0.24: U201.32@4.275,-9.125 4.275,-9.305 4.605,-9.305 4.825,-9.525
  L1 [Signal] w0.3: 4.825,-9.525 4.925,-9.625
  L1 [Signal] w0.4: 4.925,-9.625 4.925,-9.734 5.2,-10.009 C203.1
Current_A: U101.16 U202.5 | length 39.6
  L1 [Signal] w0.3: U101.16 -3.251,-16.625 -0.976,-18.9 v3(0.8,-18.9)
  L1 [Signal] w0.5: U202.5 18.09,-3.598 20.897,-3.598 v3(20.9,-3.6)
  L4 [Signal] w0.5: v3(0.8,-18.9) 13.825,-18.9 20.9,-11.825 v3(20.9,-3.6)
Current_B: U101.17 U203.5 | length 49.9
  L1 [Signal] w0.3: U101.17 -2.85,-16.125 -1.375,-17.6 v3(0.8,-17.6)
  L1 [Signal] w0.5: U203.5 18.04,9.902 19.798,9.902 v3(19.8,9.9)
  L4 [Signal] w0.5: v3(0.8,-17.6) 13.75,-17.6 19.625,-11.725 19.625,9.711 19.8,9.886 v3(19.8,9.9)
Current_C: U101.18 U204.5 | length 60.2
  L1 [Signal] w0.3: U101.18 -2.389,-15.625 -1.614,-16.4 v3(0.8,-16.4)
  L1 [Signal] w0.5: U204.5 15.481,20.005 15.611,19.875 v3(15.625,19.875)
  L4 [Signal] w0.5: v3(0.8,-16.4) 13.5,-16.4 18.575,-11.325 18.575,18.85 17.55,19.875 v3(15.625,19.875)
DRV_ENABLE: U101.29 U201.22 U201.24 U201.26 U201.28 | length 28.4
  L1 [Signal] w0.24: U101.29 -6.45,-8.779 -4.701,-7.03 -3.446,-5.775 v3(-2.675,-5.775) ; U201.24@0.125,-8.475 0.125,-9.834 -0.116,-10.075 -1.406,-10.075 ; U201.22@0.125,-7.475 -0.359,-7.475 -1.8,-8.916 -1.8,-9.216 -2,-9.416 -2,-9.582 -1.507,-10.075 -1.406,-10.075 ; U201.26@1.275,-9.125 1.275,-10.37 0.759,-10.886 0.759,-11.345 ; U201.28@2.275,-9.125 2.275,-11.159 2.089,-11.345 0.759,-11.345 ; -1.406,-10.075 -0.136,-11.345 0.759,-11.345
  L4 [Signal] w0.24: v3(-2.675,-5.775) -1.9,-6.55 -1.9,-7.783 -2.4,-8.283 -2.4,-9.1 v3(-2,-9.5)
DRV_FAULT: R202.1 U101.38 U201.17 | length 23.9
  L1 [Signal] w0.24: v4(-12.6,-12.6) -12.075,-13.125 U101.38 ; v4(-6.4,-4.78) -6.4,-2.7 -6,-2.3 -2.55,-2.3 ; R202.1 -3.4,-3.25 -2.55,-2.4 -2.55,-2.3 ; U201.17@0.125,-4.975 -0.055,-4.975 -0.055,-4.795 -2.55,-2.3
  L4 [Signal] w0.24: v4(-12.6,-12.6) -12.6,-10.994 -6.4,-4.794 v4(-6.4,-4.78)
DRV_MISO: R201.1 U101.27 U201.18 | length 11.8
  L1 [Signal] w0.24: U101.27 -5.45,-9.529 -1.396,-5.475 ; R201.1@-3.3,-4.4 R201.1@-3.26,-4.44 ; R201.1@-3.06,-4.44 -2.431,-4.44 -1.396,-5.475 ; U201.18@0.125,-5.475 -1.396,-5.475
DRV_MOSI: U101.28 U201.19 | length 12.9
  L1 [Signal] w0.2: U101.28 -5.95,-9.05 v3(-4.2,-7.3)
  L1 [Signal] w0.24: v3(-4.225,-9.125) -4.225,-9.075 -1.125,-5.975 U201.19@0.125,-5.975
  L4 [Signal] w0.24: v3(-4.225,-9.125) -4.225,-7.325 v3(-4.2,-7.3)
DRV_NSC: U101.25 U201.21 | length 7.3
  L1 [Signal] w0.24: U101.25 -4.45,-10.85 -0.575,-6.975 U201.21@0.125,-6.975
DRV_PWM_A: U101.32 U201.23 | length 18.5
  L1 [Signal] w0.24: U101.32 -7.98,-11.895 -7.98,-7.38 -6.8,-6.2 -4.984,-6.2 -4.784,-6 v3(-4.7,-6) ; v3(-0.925,-9.5) -0.945,-9.48 -0.945,-8.613 -0.307,-7.975 U201.23@0.125,-7.975
  L4 [Signal] w0.24: v3(-4.7,-6) -3.9,-6 -3.1,-6.8 -3.1,-10.059 -2.959,-10.2 -1.4,-10.2 -0.984,-9.784 -0.984,-9.559 v3(-0.925,-9.5)
DRV_PWM_B: U101.31 U201.25 | length 16.6
  L1 [Signal] w0.24: U101.31 -7.45,-7.65 -6.725,-6.925 v3(-5.625,-6.925) ; v3(0.275,-10.55) 0.275,-10.482 0.775,-9.982 U201.25@0.775,-9.125
  L4 [Signal] w0.24: v3(-5.625,-6.925) -5.3,-7.25 -5.3,-9 -3.6,-10.7 0.041,-10.7 0.191,-10.55 v3(0.275,-10.55)
DRV_PWM_C: U101.30 U201.27 | length 18.2
  L1 [Signal] w0.24: U101.30 -6.95,-8.309 -6.4,-7.759 v3(-6.4,-7.7) ; v3(1.725,-10.8) 1.775,-10.75 U201.27@1.775,-9.125
  L4 [Signal] w0.24: v3(-6.4,-7.7) -6.4,-9.275 -3.675,-12 1.644,-12 1.784,-11.859 1.784,-10.859 v3(1.725,-10.8)
DRV_SCK: U101.26 U201.20 | length 8.1
  L1 [Signal] w0.24: U101.26 -4.92,-11.895 -4.92,-10.67 -0.725,-6.475 U201.20@0.125,-6.475
DVDD: C205.2 U201.29 | length 1.1
  L1 [Signal] w0.24: U201.29@2.775,-9.125 2.775,-9.95 2.99,-10.165 C205.2
FDCAN1_RX: U101.33 U103.4 | length 12.3
  L1 [Signal] w0.3: U103.4 -10.82,-5.48 -8.45,-7.85 U101.33
FDCAN1_TX: U101.34 U103.1 | length 13.6
  L1 [Signal] w0.3: U103.1 -14.63,-3.27 -8.95,-8.95 U101.34
GHA: Q201.2 U201.5 | length 11.2
  L1 [Signal] w0.24: U201.5@4.925,-6.475 5.725,-6.475 6.2,-6 8.9,-6 10.7,-7.8 14.035,-7.8 14.76,-8.525 Q201.2
GHB: Q202.2 U201.12 | length 18.6
  L1 [Signal] w0.24: U201.12@2.775,-4.325 2.775,-3.125 4.7,-1.2 4.7,2.287 6.213,3.8 13.835,3.8 14.76,2.875 Q202.2
GHC: Q203.2 U201.13 | length 21.1
  L1 [Signal] w0.24: U201.13@2.275,-4.325 2.275,-3.025 3.7,-1.6 3.7,2.7 8.4,7.4 14.035,7.4 14.76,6.675 Q203.2
GLA: Q204.2 U201.7 | length 8.5
  L1 [Signal] w0.24: U201.7@4.925,-5.475 5.227,-5.475 5.495,-5.207 5.495,-5.205 6.2,-4.5 9.3,-4.5 11.393,-6.593 12.018,-6.593 Q204.2
GLB: Q205.2 U201.10 | length 9.2
  L1 [Signal] w0.24: U201.10@3.775,-4.325 3.775,-3.825 4.725,-2.875 Q205.2
GLC: Q206.2 U201.15 | length 20.5
  L1 [Signal] w0.24: U201.15@1.275,-4.325 1.275,-2.922 2.4,-1.797 2.4,4.2 6.725,8.525 Q206.2
GND: ?.1 C101.2 C102.1 C103.2 C104.1 C105.1 C106.1 C107.1 C108.2 C109.1 C110.1 C111.1 C112.1 C113.1 C114.1 C115.1 C116.1 C117.1 C118.1 C202.1 C204.2 C205.1 C206.1 C207.1 C208.1 C301.1 C302.1 C303.1 C304.1 C305.1 C306.1 C307.1 C308.1 C309.1 C310.1 C311.1 C312.1 C313.1 C314.1 C315.1 C316.1 C317.1 C318.1 P101.6 P102.1 Q204.1 Q205.1 Q206.1 R101.2 R301.2 U101.49 U102.7 U102.8 U102.23 U102.24 U102.27 U102.28 U102.29 U102.30 U102.33 U103.2 U103.8 U201.8 U201.9 U201.16 U201.30 U201.33 U202.2 U202.7 U203.2 U203.7 U204.2 U204.7 U301.2 U301.4 Y101.2 Y101.4 | length 113.8
  L1 [Signal] w0.24: U201.16@0.775,-4.325 0.775,-4.975 0.92,-5.12 v1(1.225,-5.425) ; v1(2.525,-6.725) 3.275,-7.475 U201.30@3.275,-9.125 ; v1(3.825,-5.425) 4.275,-4.975 ; U201.9@4.275,-4.325 4.275,-4.975 ; U201.8@4.925,-4.975 4.275,-4.975
  L1 [Signal] w0.5: R301.2 -14.275,17.4 -13.65,18.025 U301.4 ; v3(-12.8,11.3) -12.8,11.286 -12.775,11.261 C103.2 ; v1(-7.9,-23.55) -7.873,-23.55 -7.448,-23.125 C117.1 -6.275,-23.15 -5.075,-23.15 Y101.4 ; Y101.2@-4,-21.875 -3.875,-22 -3.809,-22 -3.159,-22.65 -2.55,-22.65 C101.2 -2.49,-22.7 -1.919,-23.271 -1.919,-23.531 v1(-1.9,-23.55) ; U202.7 U202.2
  L1 [Signal] w0.6: P101.6 -16.825,-17.775 v1(-15.6,-19) -14.725,-19.875 -14.2,-19.875 R101.2 ; v2(-15.8,6.2) -15.762,6.162 -15.262,6.162 -14.655,5.555 -14.655,4.812 U103.8 ; v1(-13.4,1.5) -13.36,1.46 -13.36,-1.94 ccw(c-13.06,-1.94) -13.358,-1.97 -13.147,-2.291 cw(c-13.648,-2.622) -13.075,-2.442 -13.06,-2.49 C102.1 ; v1(-12.7,23.425) -12.675,23.45 C302.1@-11.5,23.45 ; v1(-12.4,-8.9) -12.4,-8.95 -10.66,-10.69 C111.1 ; C118.1 -6.215,-20.88 -6.215,-20.215 v1(-6.2,-20.2) ; C112.1 -1.47,-11.44 v1(-1.46,-11.43) ; C114.1 v1(-0.5,-13) ; C116.1 -0.333,-15.66 v1(-0.312,-15.681) ; C205.1 3.01,-11.085 C204.2 4.035,-11.085 4.75,-11.8 v1(5.5,-11.8) ; v1(10.1,22.3) C113.1 ; v2(10.3,17.7) 10.33,17.73 C208.1@11.845,17.73 ; C208.1 C208.1@11.845,17.73 ; U204.7 12.11,17.465 C208.1@11.845,17.73 ; v2(15.4,21.4) 15.454,21.4 16.044,21.99 17.115,21.99 C115.1 ; C207.1 16.45,7.59 16.51,7.53 17.435,7.53 17.6,7.365 U203.7 U203.2 ; C206.1 17.505,-5.99 17.65,-6.135 U202.7 ; U204.2 19.23,17.482 21.782,17.482 v2(21.8,17.5)
  L1 [Signal] w0.7: C202.1 8.05,-7.15 8.85,-7.15 v1(9.2,-7.5) 9.675,-7.975 9.675,-8.775 C307.1 C308.1 ; v2(8.1,5) C304.1 C303.1
  L4 [Signal] w0.24: U102.7 -4.148,1.948 U102.33@-1.948,1.948 ; U102.8 -2.8,2.8 U102.33@-1.948,1.948 ; v1(-1.5,-1.5) -1.2,-1.8 U102.30 ; v1(-1.5,1.5) U102.33@-1.948,1.948 ; U102.29 -0.4,-1.9 v1(0,-1.5) ; U102.28 0.4,-1.9 v1(0,-1.5) ; U102.27 1.2,-2.112 0.588,-1.5 v1(0,-1.5) ; v1(1.5,-1.5) U102.33@1.948,-1.948 ; U102.24 2.8,-2.8 U102.33@1.948,-1.948 ; U102.23 4.148,-1.948 U102.33@1.948,-1.948
  L4 [Signal] w0.6: C104.1 C105.1 C106.1 C107.1 8.046,1.5 8.546,2 v2(8.6,2)
  L4 [Signal] w0.7: C311.1 C309.1 C310.1 C312.1 C313.1 C314.1 C317.1 C315.1 C316.1 C318.1 10.523,9.35 10.773,9.6 v2(10.8,9.6)
  other v1: -11.8,-20.4 -9.4,-17.575 -8.3,-17.575 -7.2,-17.575 -6.1,-17.575 -5,-17.575 -9.4,-16.475 -8.3,-16.475 -7.2,-16.475 -6.1,-16.475 -5,-16.475 -9.4,-15.375 -8.3,-15.375 -7.2,-15.375 -6.1,-15.375 -5,-15.375 -9.4,-14.275 -8.3,-14.275 -7.2,-14.275 -6.1,-14.275 -5,-14.275 -9.4,-13.175 -8.3,-13.175 -7.2,-13.175 -6.1,-13.175 -5,-13.175 1.225,-8.025 2.525,-8.025 3.825,-8.025 1.225,-6.725 3.825,-6.725 2.525,-5.425 -1.5,0 0,0 1.5,0 0,1.5 1.5,1.5
  other v2: 21.8,-6.1 10.5,-4 10.7,-1.6 21.1,7.4 -12.675,15.3 -13.575,16.2 -11.875,16.2 -12.775,17 -11.075,17.1 -11.975,17.9
NetD301_2: D301.2 R301.1 | length 1
  L1 [Signal] w0.4: R301.1 D301.2
NRST: C101.1 P101.2 R102.2 U101.7 | length 34.9
  L1 [Signal] w0.3: v4(-19.3,-8.1) -16.85,-8.1 P101.2 ; U101.7 -6.95,-19.424 -6.774,-19.6 -5.5,-19.6 -4.857,-20.243 -4.857,-20.743 v1(-4.8,-20.8) -4.743,-20.743 -4.53,-20.743 -4.513,-20.725 R102.2 ; -3.49,-20.8 C101.1@-2.51,-21.78
  L4 [Signal] w0.3: v4(-19.3,-8.1) -19.3,-16.4 -14.4,-21.3 -5.361,-21.3 -4.861,-20.8 v1(-4.8,-20.8)
OSC_IN: C117.2 U101.5 Y101.1 | length 10.8
  L1 [Signal] w0.3: U101.5 -7.95,-19.6 -8.8,-20.45 -8.8,-23.761 -8.311,-24.25 -6.674,-24.25 -6.619,-24.195 -6.46,-24.195 -6.31,-24.045 C117.2 -4.696,-24.045 -4.225,-23.574 -4.225,-23.4 Y101.1
OSC_OUT: R106.1 U101.6 | length 1.9
  L1 [Signal] w0.3: U101.6 -7.45,-20.7 R106.1
OSC_R: C118.2 R106.2 Y101.3 | length 2.4
  L1 [Signal] w0.3: R106.2@-7.382,-21.868 R106.2 -7.375,-21.825 -6.25,-21.825 C118.2 -6.212,-21.813 -5.063,-21.813 Y101.3
SWCLK: P101.4 U101.37 | length 6.6
  L1 [Signal] w0.3: P101.4 -16.55,-11.8 -12.4,-11.8 -11.575,-12.625 U101.37
SWDIO: P101.3 U101.36 | length 7.8
  L1 [Signal] w0.3: P101.3 -16.55,-10.35 -12.375,-10.35 -11.125,-11.6 -10.126,-11.6 -10.076,-11.65 -9.95,-11.65 U101.36
V_SUPPLY: ?.2 C201.1 C202.2 C301.2 C303.2 C304.2 C305.2 C306.2 C307.2 C308.2 C309.2 C310.2 C311.2 C312.2 C313.2 C314.2 C315.2 C316.2 C317.2 C318.2 Q201.3 Q202.3 Q203.3 U201.2 U201.3 U301.1 | length 10.9
  L1 [Signal] w0.24: U201.2@4.925,-7.975 5.725,-7.975 5.8,-7.9 ; U201.3@4.925,-7.475 5.659,-7.475 5.8,-7.616 5.8,-7.9 ; C201.1 6.47,-8.27 6.17,-8.27 5.8,-7.9
  L1 [Signal] w0.7: C201.1 C202.2 8.025,-10.625 8.7,-11.3 10.665,-11.3 11.075,-10.89 11.075,-10.22 C308.2@11.1,-10.22
  other v1: -8.275,14 -7.675,14.7 -8.575,14.8
  other v2: 12.5,-10.4 13.5,-10.4 12.5,-9.5 13.4,-9.5 12.5,-8.6 13.4,-8.6 12.6,1 13.5,1 12.6,1.9 13.5,1.9 12.6,2.8 13.5,2.8 12.6,4.8 13.5,4.8 12.6,5.7 13.5,5.7 12.6,6.6 13.5,6.6
VCP: C201.2 U201.4 | length 1.9
  L1 [Signal] w0.24: U201.4@4.925,-6.975 6.575,-6.975 C201.2
VDDA_FILTERED: C113.2 C114.2 C206.2 C207.2 C208.2 FB101.2 R105.1 U101.21 U202.6 U203.6 U204.6 | length 70.4
  L1 [Signal] w0.3: U101.21 -2.925,-14.125 -2.9,-14.1
  L1 [Signal] w0.4: -2.9,-14.1 -2.66,-13.86 C114.2@-1.7,-13.86 ; FB101.2 12.4,22.31 C113.2
  L1 [Signal] w0.5: C114.2 0.716,-13.92 0.986,-13.65 v3(1,-13.65) ; C113.2 13.53,22.3 ; C206.2@16.4,-5.01 16.51,-4.9 U202.6@18.053,-4.9 ; v3@16.425,9.725 16.425,9.711 16.45,9.686 C207.2 16.472,8.612 18.015,8.612 U203.6 ; v3(16.425,17.375) 15.065,18.735 U204.6 13.785,18.737 11.878,18.737 C208.2 11.9,18.765 11.9,19.77 13.53,21.4 13.53,22.3 ; C206.2 v3(16.5,-3.989) ; R105.1 15.45,23.1 14.65,22.3 13.53,22.3
  L4 [Signal] w0.5: v3(1,-13.65) 13.175,-13.65 16.4,-10.425 16.4,-3.989 v3(16.4,9.725) ; v3@16.425,9.725 v3(16.425,17.375)
VGLS: C204.1 U201.31 | length 1.1
  L1 [Signal] w0.24: U201.31@3.775,-9.125 3.775,-9.925 4.015,-10.165 C204.1
VREF+_FILTERED: C115.2 C116.2 R105.2 U101.20 U202.3 U203.3 U204.3 | length 75.1
  L1 [Signal] w0.3: U101.20 -2.675,-14.625
  L1 [Signal] w0.4: -2.675,-14.625 -2.6,-14.7 -2,-14.7
  L1 [Signal] w0.5: -2,-14.7 -1.24,-14.7 -1.2,-14.74 0.626,-14.74 0.886,-15 v3(0.9,-15) ; v3(17.55,17.45) 17.55,18.578 17.393,18.735 ; v1@17.575,11.2 20.45,11.2 21.4,10.25 21.4,8.928 21.693,8.635 U203.3 ; v1(17.6,-2.15) 17.627,-2.15 17.977,-2.5 21.175,-2.5 21.725,-3.05 21.725,-4.557 22.018,-4.85 23.497,-4.85 U202.3 ; R105.2 18.03,23.095 18.03,22.005 C115.2 17.985,21.95 17.985,21.515 17.1,20.63 17.1,19.028 17.393,18.735 ; U204.3 17.393,18.735
  L4 [Signal] w0.5: v3(0.9,-15) 13.275,-15 17.55,-10.725 17.55,-2.15 17.562,-2.138 17.562,11.188 17.575,11.2 17.575,17.411 17.55,17.436 v3(17.55,17.45)
  other v1: 17.6,11.2
pads on no net: ?.3 ?.4 MH1.MH MH2.MH MH3.MH MH4.MH P101.1 P101.MP1 P101.MP2 U101.2 U101.3 U101.4 U101.8 U101.9 U101.10 U101.12 U101.13 U101.14 U101.15 U101.19 U101.22 U101.24 U101.41 U101.42 U101.47 U102.9 U102.10 U102.11 U102.12 U102.13 U102.14 U102.15 U102.16 U102.17 U102.18 U102.25 U102.26 U202.4 U203.4 U204.4

## Polygon pours and split planes (outlines as drawn)
B_IN- on L1 [Signal] "B_IN-_L01_P020" (solid, remove dead copper, pour order 20): 22.775,2.775 22.775,4.125 22.725,4.125 21.575,4.125 21.575,2.775 20.025,2.161 20.025,-0.7 20.944,-1.925 23,-1.925 23.925,-0.659 23.925,2.155
A_IN- on L1 [Signal] "A_IN-_L01_P021" (solid, remove dead copper, pour order 21): 22.622,-10.675 22.6,-10.653 22.6,-9.43 21.48,-9.43 21.48,-10.675 20.05,-11.857 20.05,-14.625 21.07,-15.9 22.97,-15.9 23.925,-14.706 23.925,-11.822
C_IN- on L1 [Signal] "C_IN-_L01_P019" (solid, remove dead copper, pour order 19): 23.35,12.05 23.9,12.6 23.9,15.3 23.25,15.95 20.95,15.95 19,14 17.35,14 17.35,12.05
GND on L1 [Signal] "GND_L01_P032" (solid, pour order 32): 12.5,8.9 12.5,10.7 10.2,10.7 10.2,8.9
GND on L1 [Signal] "GND_L01_P031" (solid, pour order 31): 10,3.1 10,0.8 8,0.8 8,3.1
GND on L1 [Signal] "GND_L01_P030" (solid, remove dead copper, pour order 30): 12.5,-0.7 12.5,-2.5 10.1,-2.5 10.1,-0.7
GND on L1 [Signal] "GND_L01_P029" (solid, remove dead copper, pour order 29): 11.8,-6.3 12.5,-6.3 12.5,-4.5 11.4,-3.4 9.8,-3.4 9.8,-4.3
GND on L1 [Signal] "GND_L01_P025" (solid, remove dead copper, pour order 25): -12.3,-18.8 -11.6,-18.8 -10.6,-19.9 -10.6,-20.5 -10.9,-20.8 -10.9,-21.9 -11.8,-21.9 -12.3,-21.4
GND on L1 [Signal] "GND_L01_P023" (solid, remove dead copper, pour order 23): -10.275,13.2 -10.275,15.5 -8.275,17.5 -6.475,17.5 -6.475,18.6 -11.675,18.6 -12.775,19.7 -14.575,19.7 -14.575,16.4 -11.375,13.2
V_SUPPLY on L1 [Signal] "V_SUPPLY_L01_P014" (solid, remove dead copper, pour order 14): 10.7,-8.2 13.9,-8.2 13.9,-10.8 10.7,-10.8
V_SUPPLY on L1 [Signal] "V_SUPPLY_L01_P022" (solid, remove dead copper, pour order 22): -8.175,16.3 -6.427,16.3 -6.427,15.148 -8.475,13.1 -9.775,13.1 -9.775,14.7
B_IN+ on L1 [Signal] "B_IN+_L01_P016" (solid, remove dead copper, pour order 16): 14.5,2.5 16.8,2.5 18.825,4.525 19.825,4.525 19.825,2.725 18.725,2.725 16.7,0.7 14.5,0.7
A_IN+ on L1 [Signal] "A_IN+_L01_P013" (solid, remove dead copper, pour order 13): 13.1,-4.5 15.9,-4.5 15.9,-10.3 15.3,-10.9 14.5,-10.9 14.5,-8.9 15.5,-8.9 15.5,-8 14.8,-7.3 13.1,-7.3
C_IN+ on L1 [Signal] "C_IN+_L01_P018" (solid, pour order 18): 15.505,13.4 15.9,12.995 15.9,10.7 14.45,10.7 14.45,13.4
A_IN+ on L1 [Signal] "A_IN+_L01_P015" (solid, remove dead copper, pour order 15): 19.2,-8.9 19.2,-10.7 14.5,-10.7 14.5,-8.9
C_IN+ on L1 [Signal] "C_IN+_L01_P008" (solid, pour order 8): 13.1,10.7 15.9,10.7 15.9,4.8 15.4,4.3 14.4,4.3 14.4,6.3 15.5,6.3 15.5,7 14.8,7.7 13.1,7.7
B_IN+ on L1 [Signal] "B_IN+_L01_P012" (solid, remove dead copper, pour order 12): 14.5,2.5 15.3,2.5 15.3,-3.1 13.1,-3.1 13.1,-0.7 14.5,0.7
V_SUPPLY on L1 [Signal] "V_SUPPLY_L01_P011" (solid, remove dead copper, pour order 11): 13.9,3.2 13.9,0.6 10.6,0.6 10.6,3.2
V_SUPPLY on L1 [Signal] "V_SUPPLY_L01_P010" (solid, remove dead copper, pour order 10): 13.9,7 10.6,7 10.6,4.4 13.9,4.4
V_SUPPLY on L4 [Signal] "V_SUPPLY_L04_P000" (solid, pour order 0): 2,15.5 5.5,15.5 5.5,12 14.7,12 14.7,-10.9 11.4,-10.9 11.4,10.2 -6.5,10.2 -10,13.7 -10,15.9 -6.1,15.9 -6.1,13.5 -4.6,12 2,12
GND on L3 [GND] "GND_L03_P035" (solid, pour order 35): -22,-24 22,-24 ccw(c22,-22) 24,-22 24,22 ccw(c22,22) 22,24 -22,24 ccw(c-22,22) -24,22 -24,-22 ccw(c-22,-22)
GND on L2 [GND] "GND_L02_P034" (solid, pour order 34): -22,-24 22,-24 ccw(c22,-22) 24,-22 24,22 ccw(c22,22) 22,24 -22,24 ccw(c-22,22) -24,22 -24,-22 ccw(c-22,-22)

## Silkscreen, mask and mechanical layers (free items; w line width, h text height)
Top Overlay:
  text "REV 0.0" at 8.279,-22.996 h1.52
Mechanical 1:
  the board outline again, w0.254